# Altium PCB PCB.PcbDoc (part 1 of 2)
Units mm, origin at the board's own origin, x right, y up, seen from the top; angles counter-clockwise.
Board outline 40 x 40 mm, 4 copper layers (Top Layer, Layer 1, Layer 2, Bottom Layer), stack 1.587 mm thick; 76 components, 59 nets, 257 pads, 289 vias.
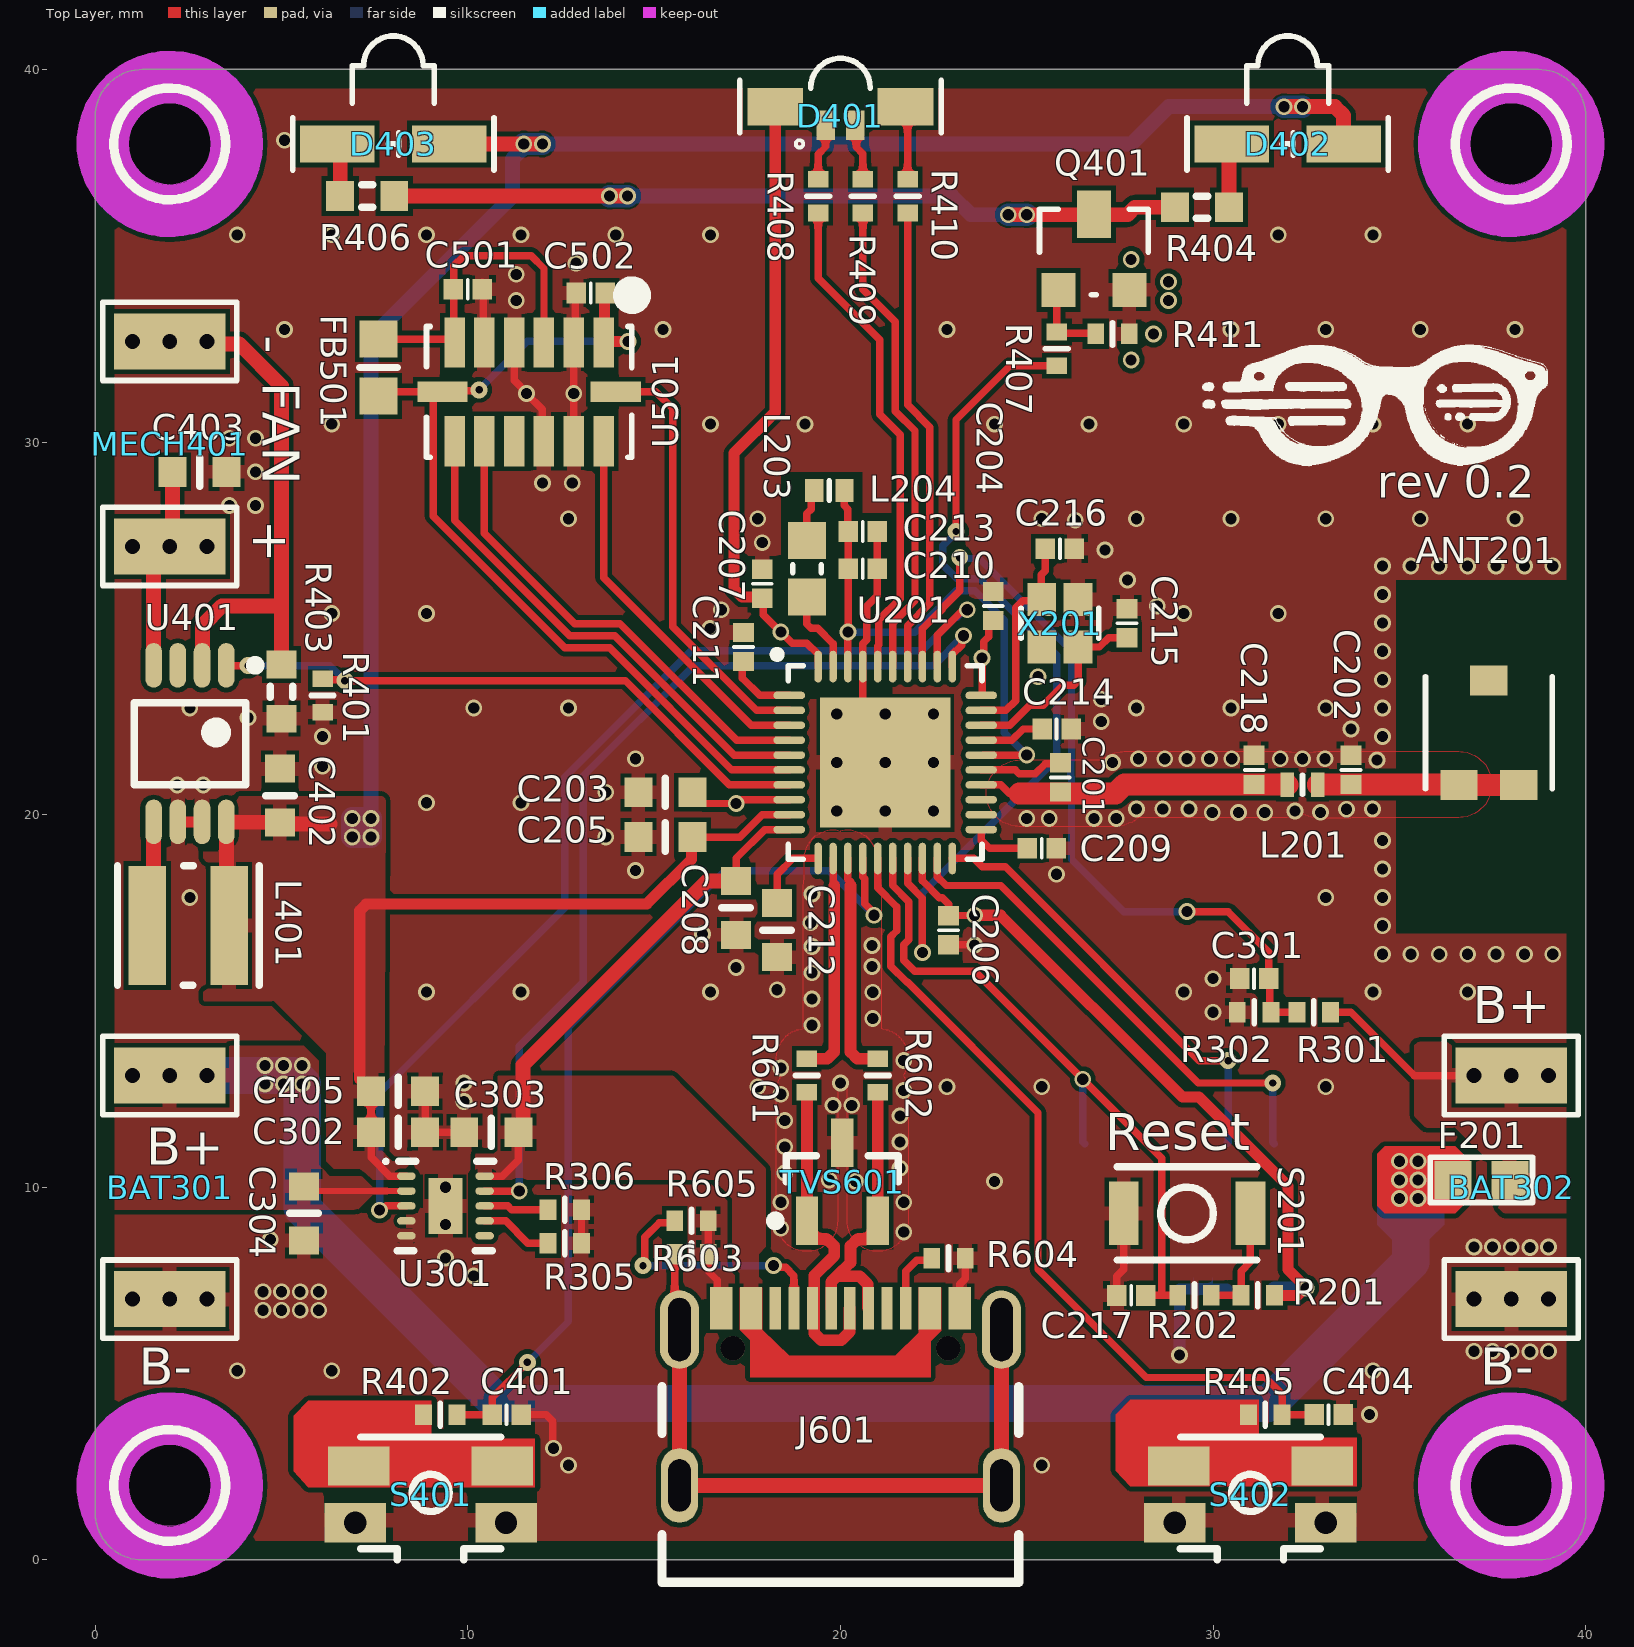
[diagram p0: Top Layer view]
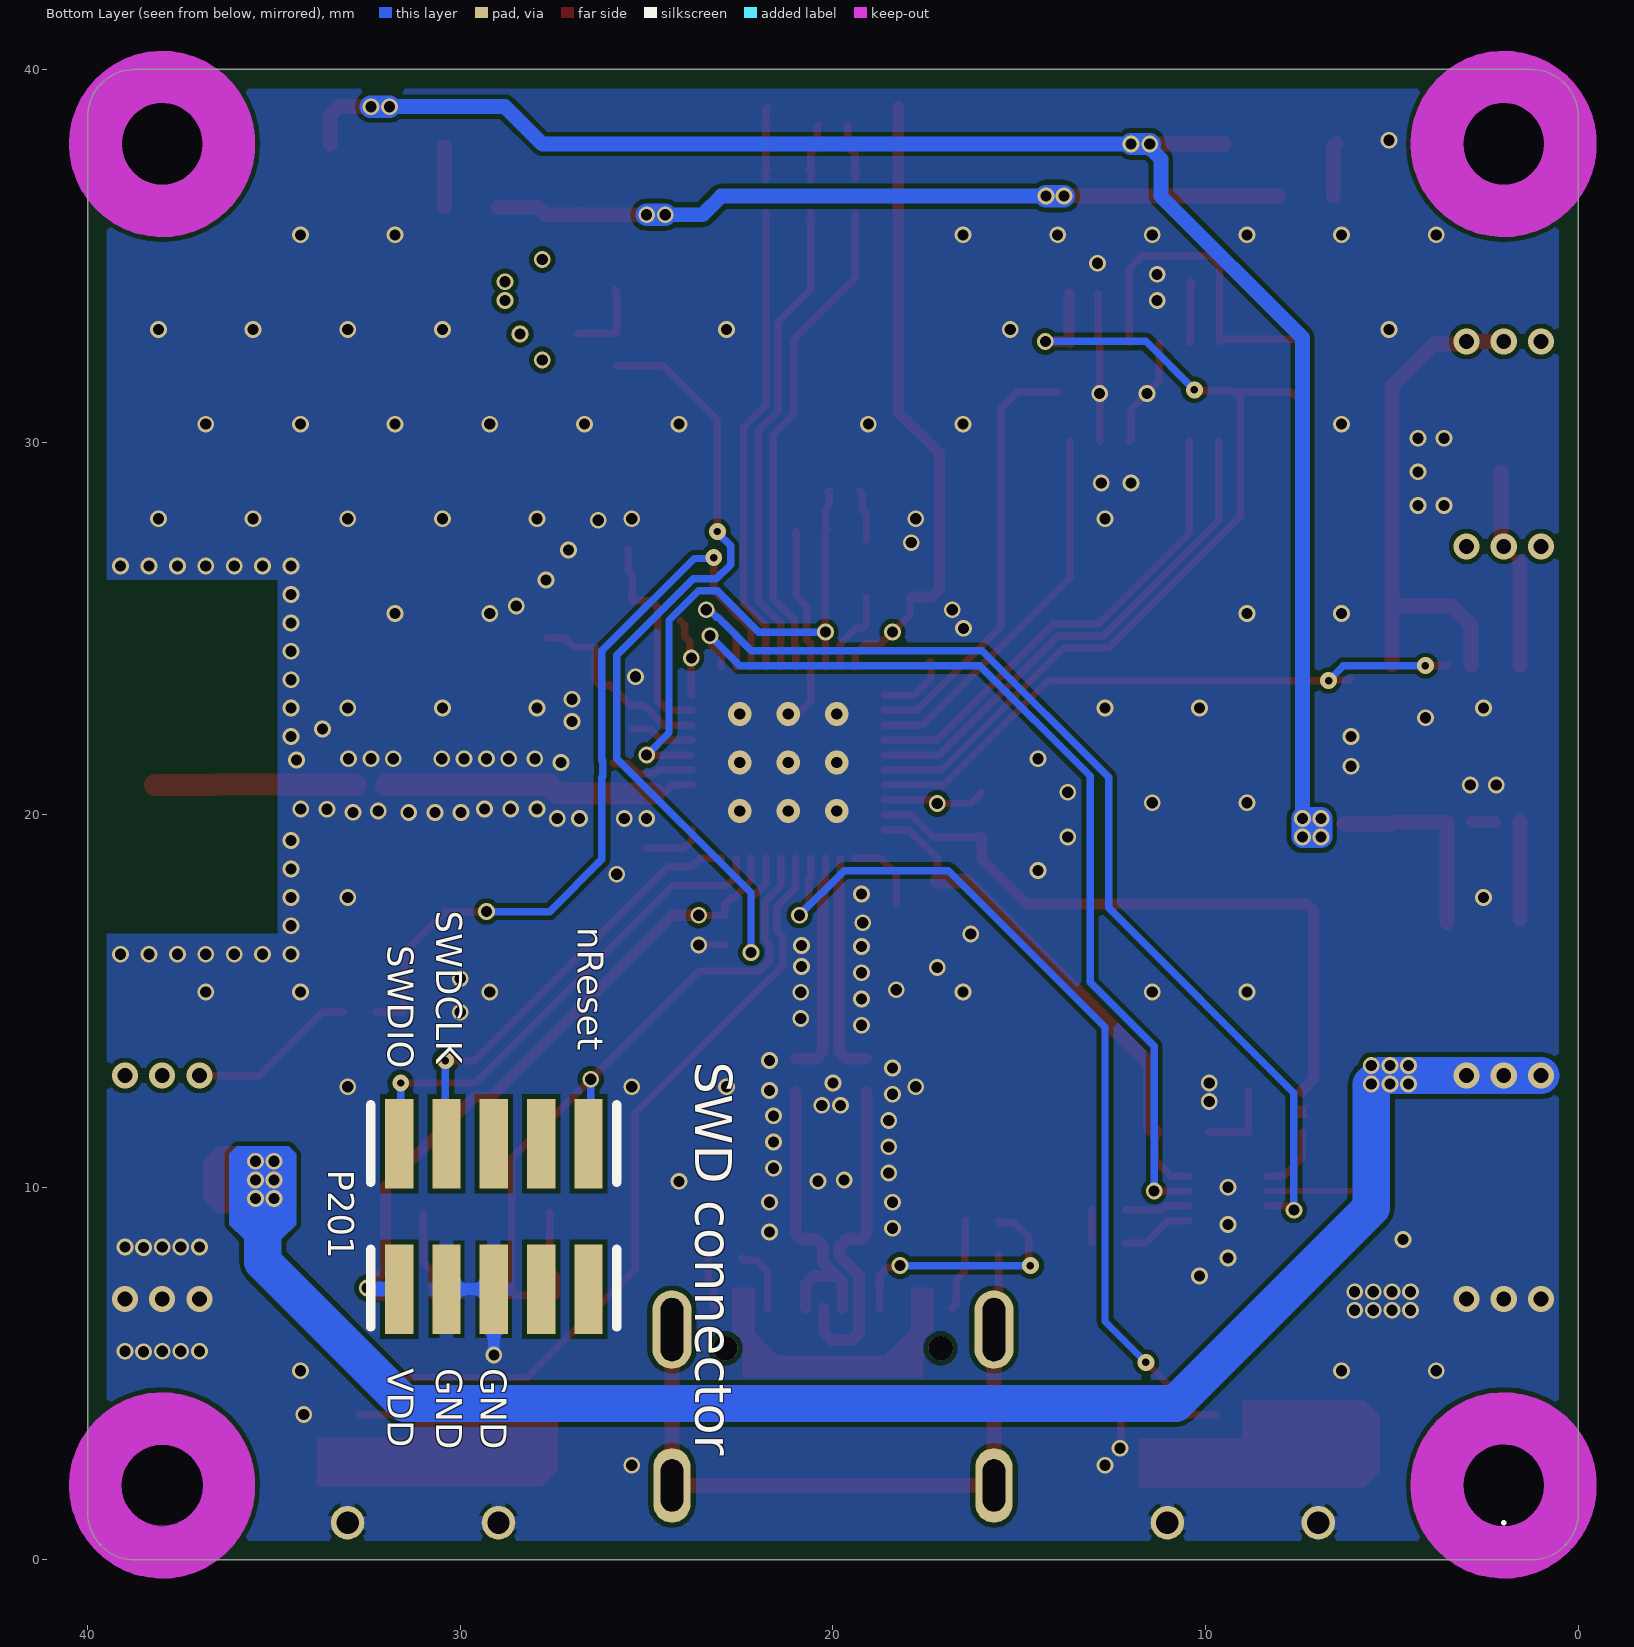
[diagram p1: Bottom Layer view, seen from below]
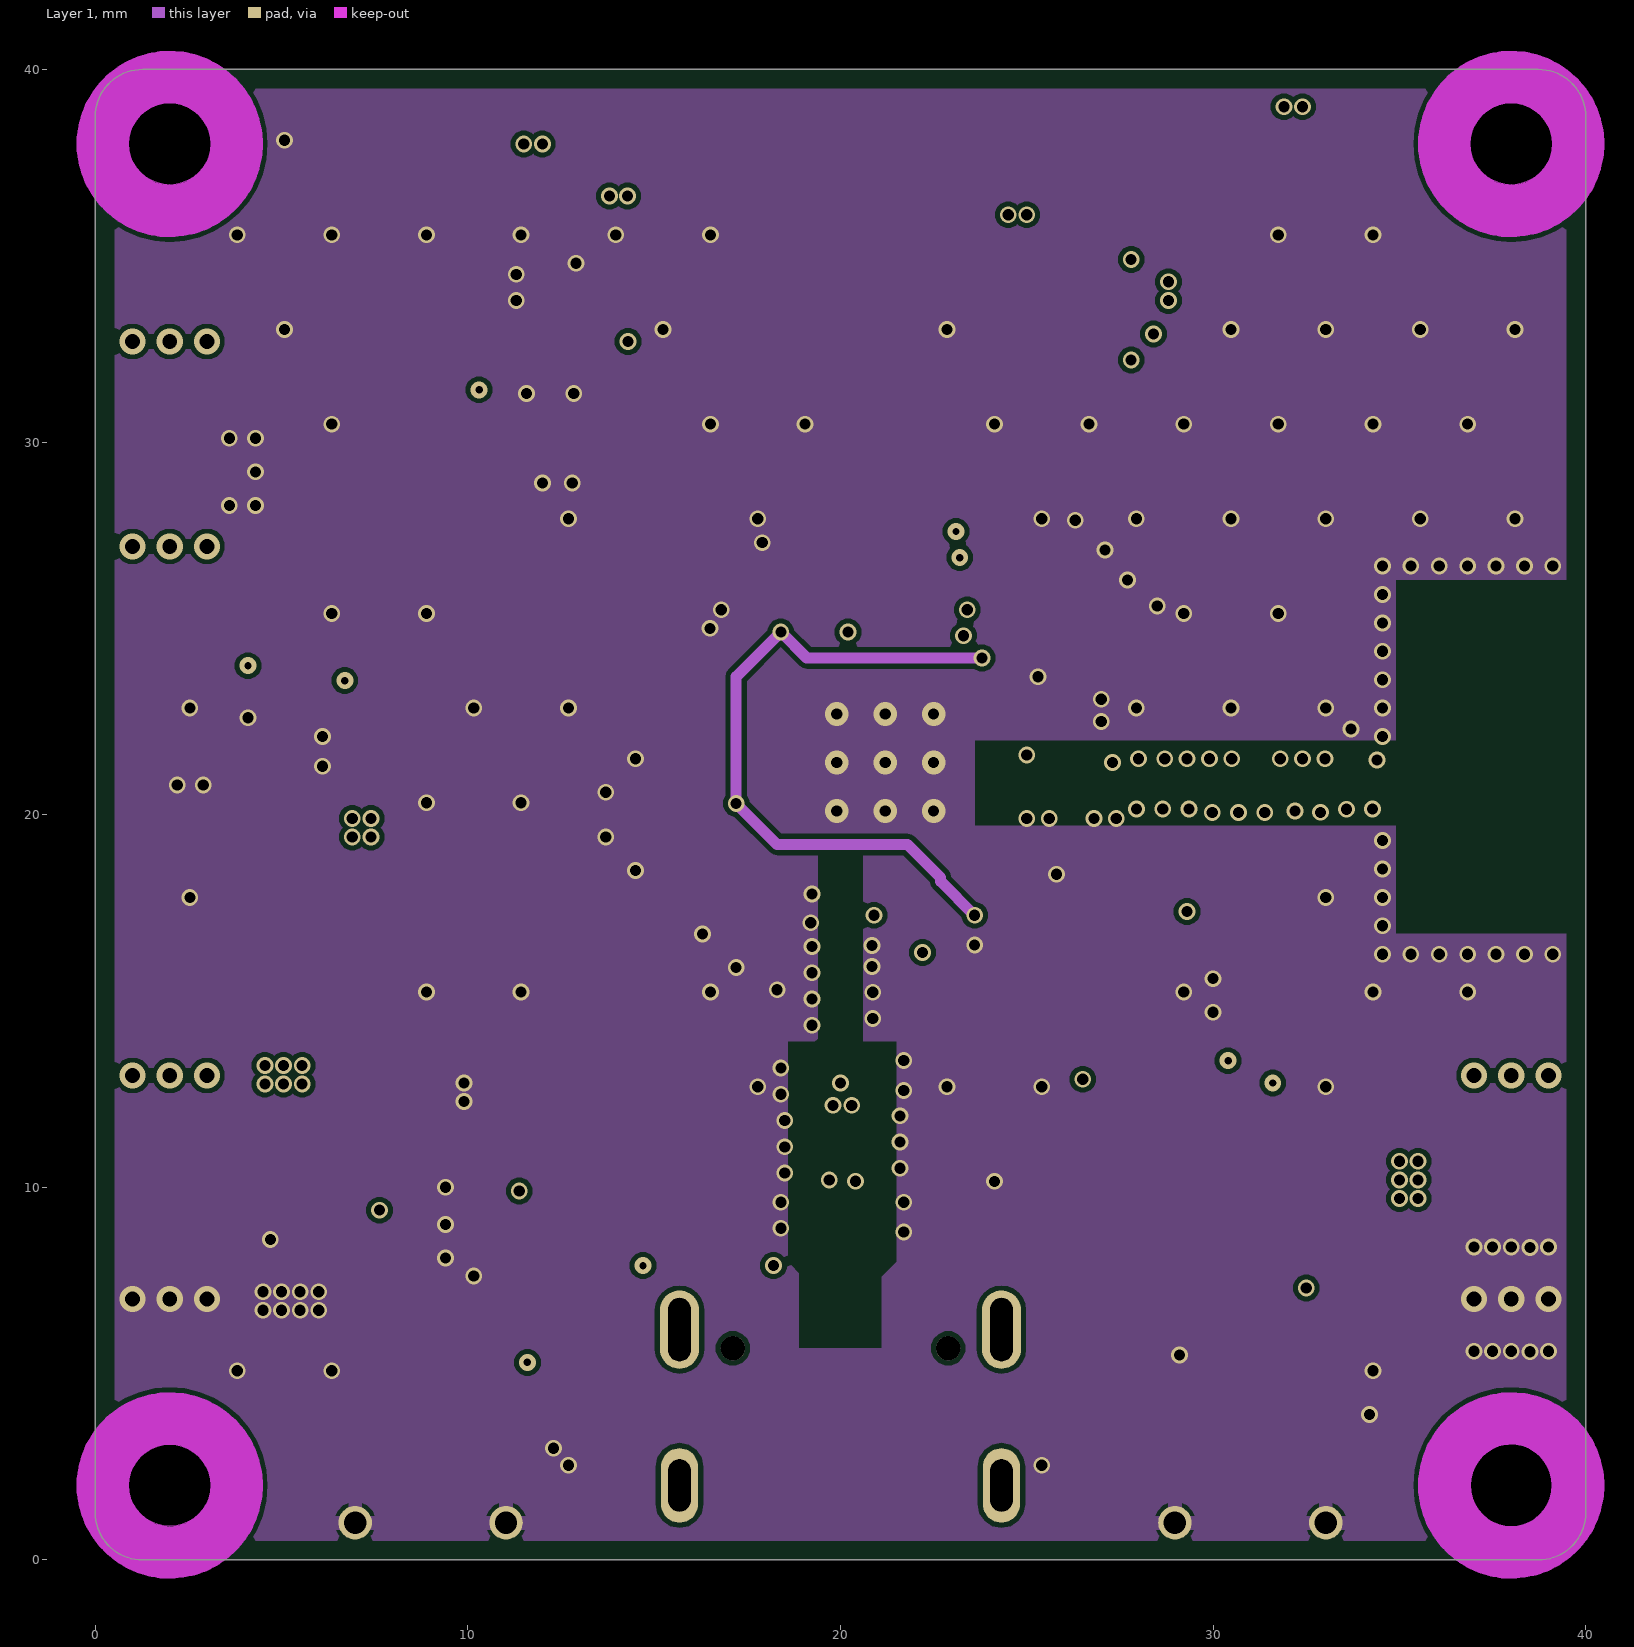
[diagram p2: Layer 1]
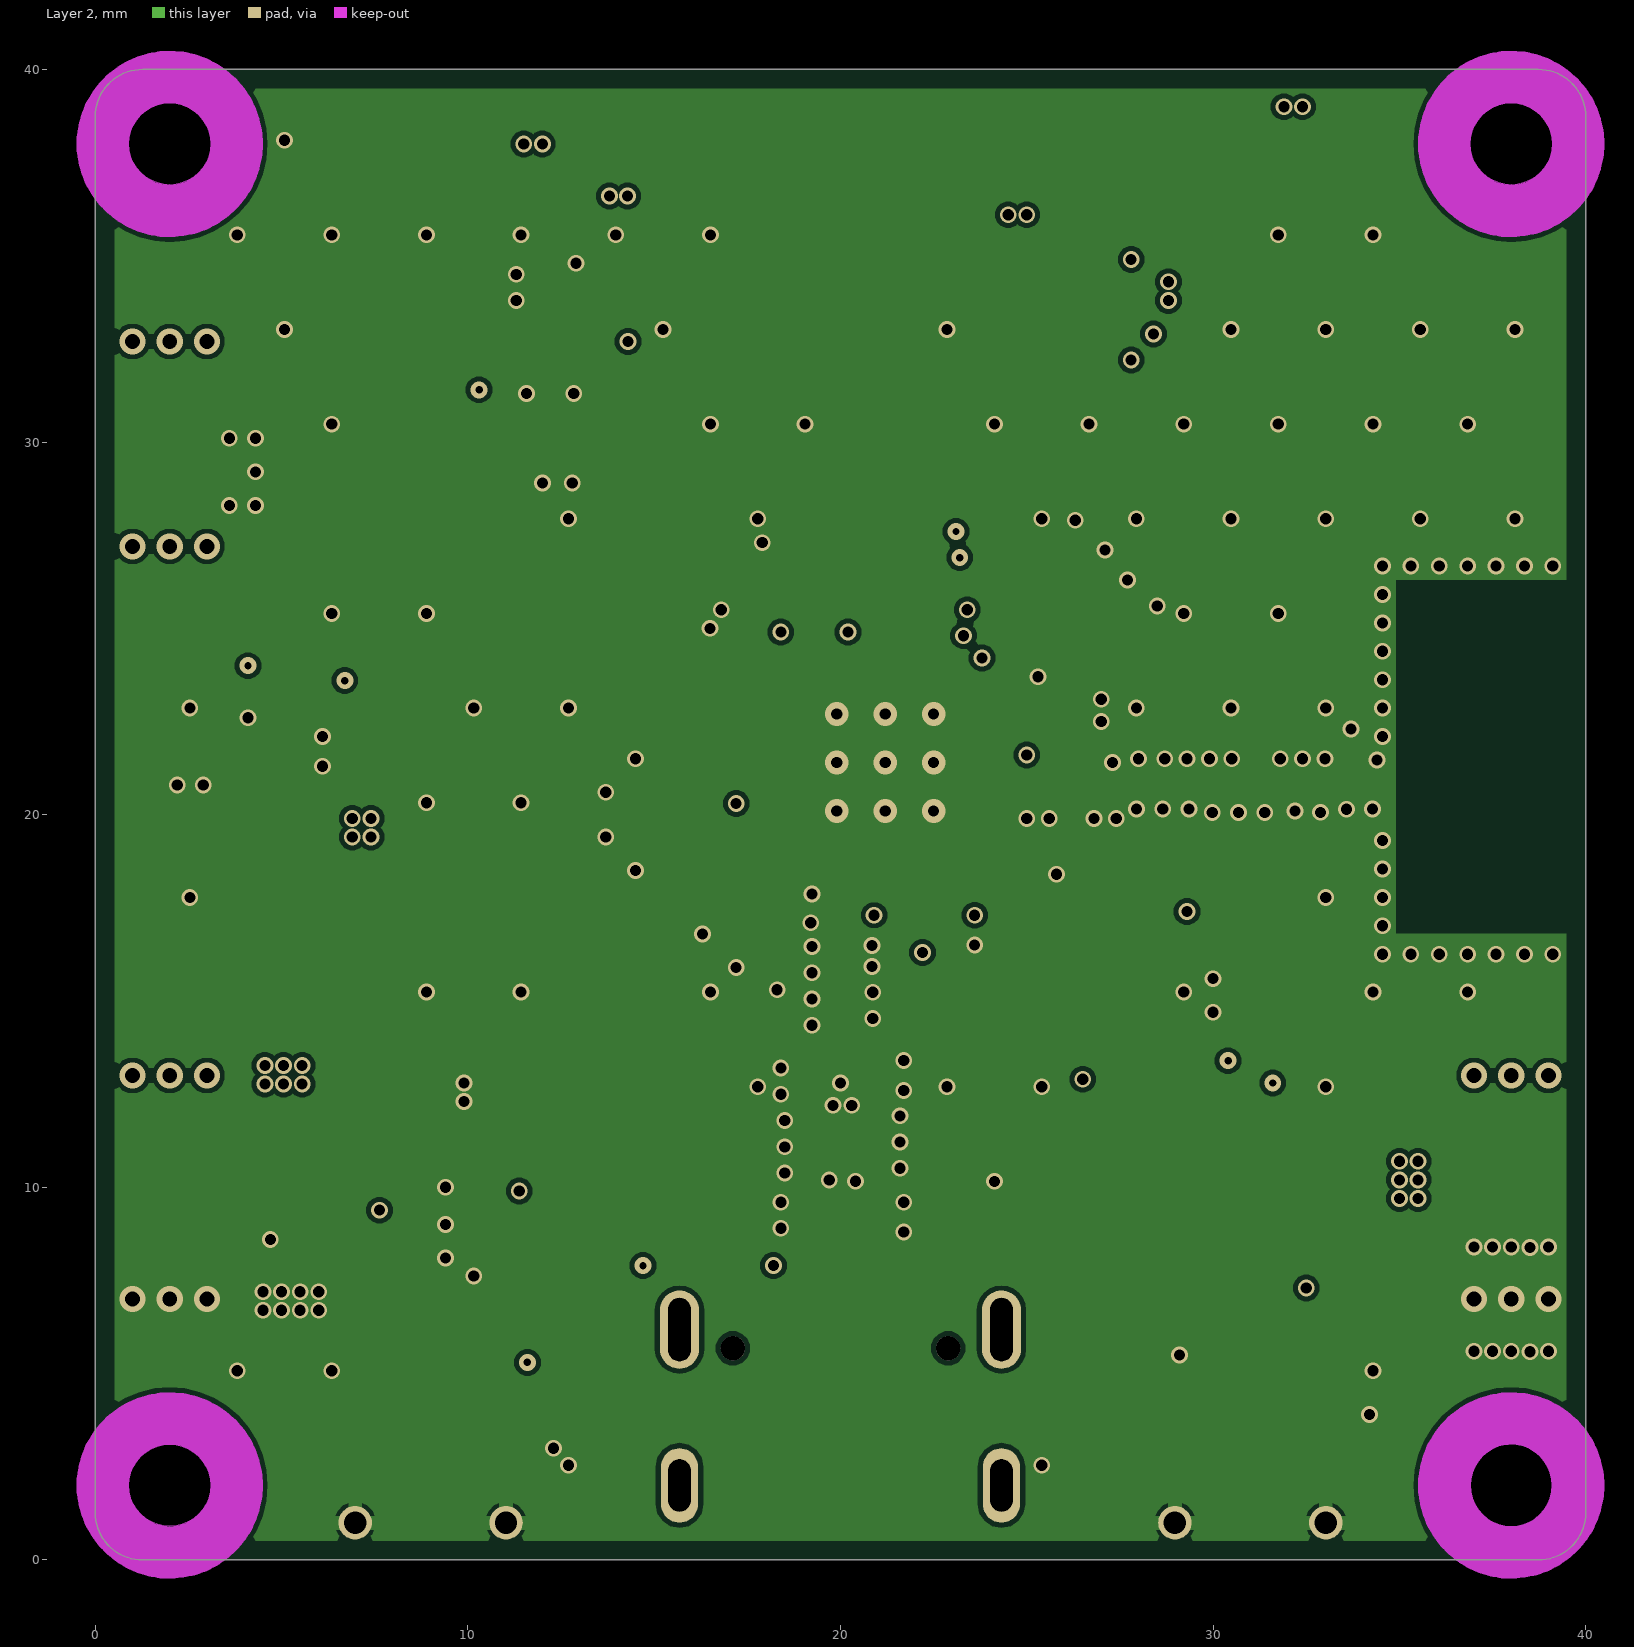
[diagram p3: Layer 2]
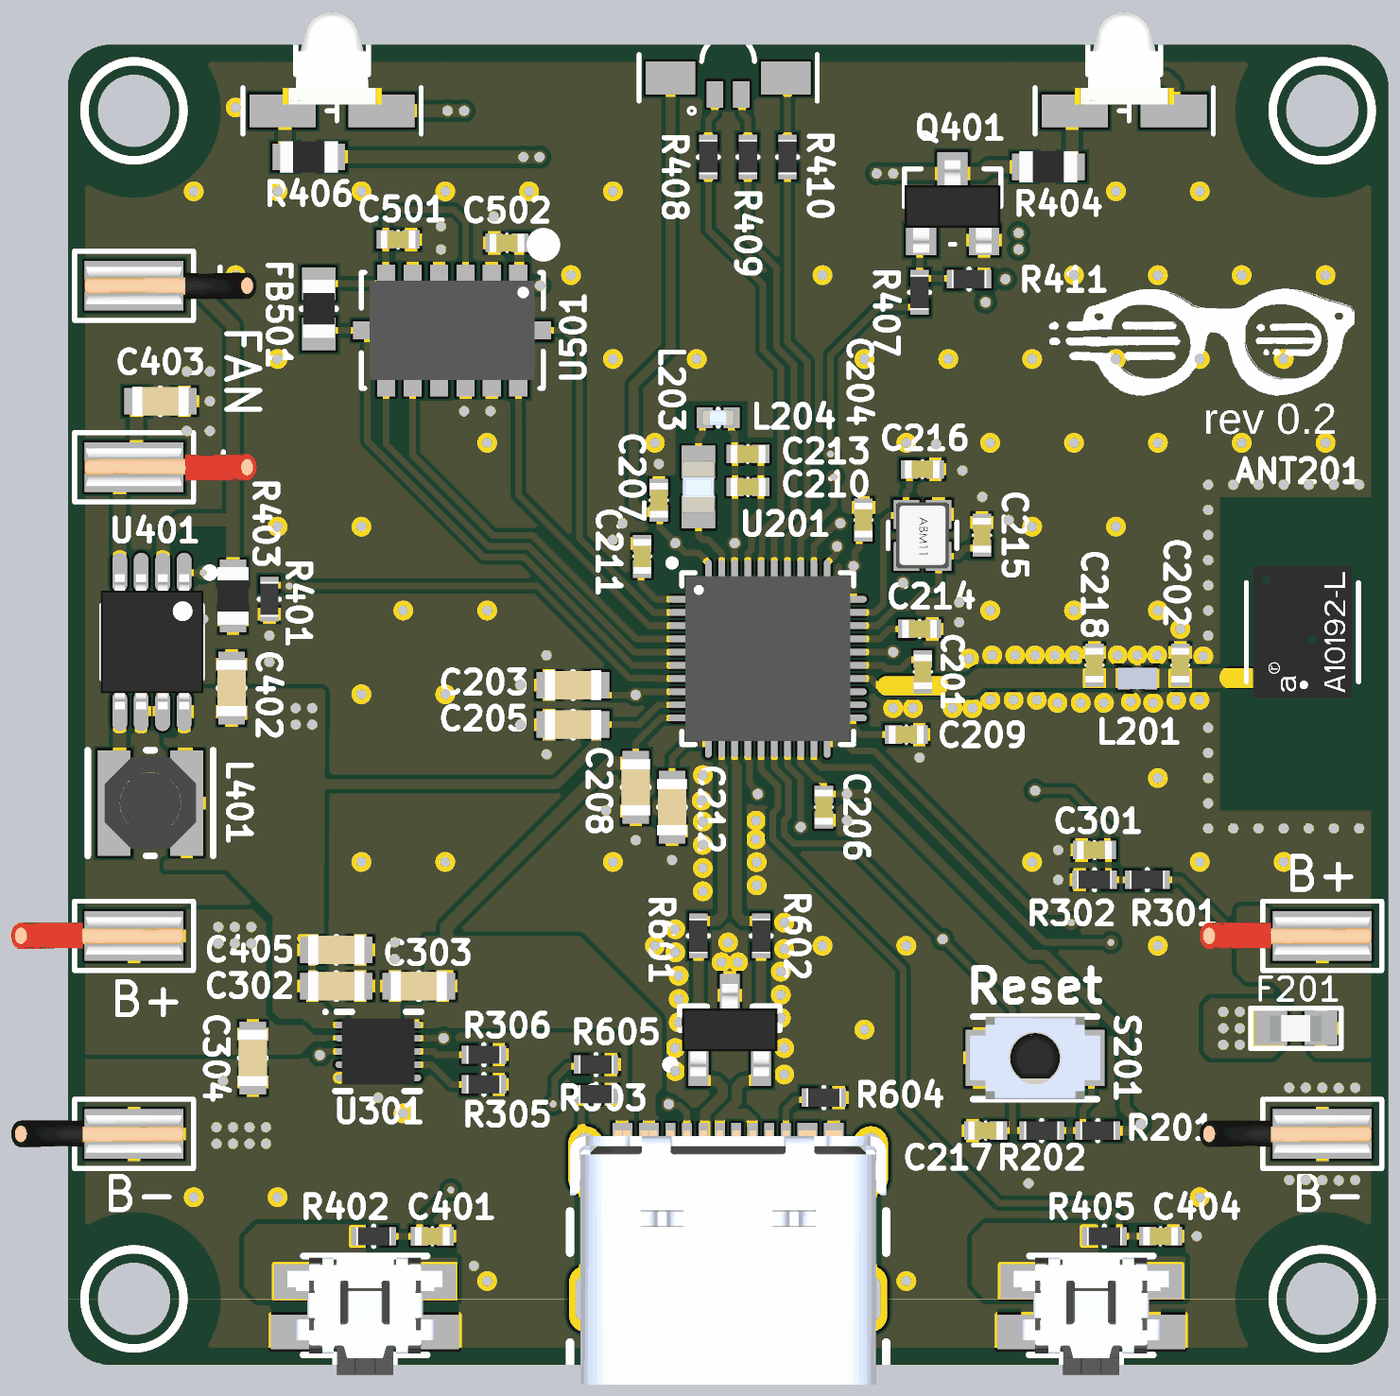
[diagram p4: 3D render of the assembled board from above, using the file's embedded part models]

## Layer stack, top to bottom
Top Solder: solder mask 0.0102, Solder Resist, Dk 3.5
Top Layer: signal copper 0.0356
Dielectric 2: prepreg 0.2104, PP-006, Dk 4.4
Layer 1: signal copper 0.0152
Dielectric 1: dielectric 1.065, FR-4, Dk 4.6
Layer 2: signal copper 0.0152
Dielectric 3: prepreg 0.2104, PP-006, Dk 4.4
Bottom Layer: signal copper 0.0356
Bottom Solder: solder mask 0.0102, Solder Resist, Dk 3.5

## Board outline
1.27,0 cw(c1.27,1.27) 0,1.27 0,38.73 cw(c1.27,38.73) 1.27,40 38.73,40 cw(c38.73,38.73) 40,38.73 40,1.27 cw(c38.73,1.27) 38.73,0
cut-out: 38,36.9 cw(c38,38) 36.9,38 cw(c38,38) 38,39.1 cw(c38,38) 39.1,38 cw(c38,38)
cut-out: 36.9,2 ccw(c38,2) 38,0.9 ccw(c38,2) 39.1,2 ccw(c38,2) 38,3.1 ccw(c38,2)
cut-out: 2,36.9 cw(c2,38) 0.9,38 cw(c2,38) 2,39.1 cw(c2,38) 3.1,38 cw(c2,38)
cut-out: 2,0.9 cw(c2,2) 0.9,2 cw(c2,2) 2,3.1 cw(c2,2) 3.1,2 cw(c2,2)

## Design rules (kind name [scope] priority, off if disabled: settings)
BoardOutlineClearance [All] p1: gap=0.2 ignorepadtopadclearanceinfootprint=FALSE except(0.508: Poly-OutlineEdge Poly-CavityEdge Poly-CutoutEdge Poly-SplitBarrior Poly-SplitContinuation)
Clearance Clearance_S90 [InNetClass('S90')] p1: gap=0.127 ignorepadtopadclearanceinfootprint=TRUE
Clearance Clearance_S50 [InNetClass('S50')] p2: gap=0.127 ignorepadtopadclearanceinfootprint=FALSE
Clearance [All] p3: gap=0.127 ignorepadtopadclearanceinfootprint=TRUE except(0.2: Track-SMDPad; 0.254: Track-Hole Via-Via; 0.33: Track-THPad; 0.54: THPad-THPad)
ComponentClearance [All] p1: gap=0.102 collisioncheckmode=3 verticalgap=0.102 showdistances=TRUE
DiffPairsRouting DiffPairsRouting_S90 [All] p1: maxlimit=0.127 minlimit=0.127 mostfreqgap=0.127 toplayer_minwidth=0.2 toplayer_maxwidth=0.313 toplayer_prefwidth=0.313 midlayer1_minwidth=0.13 midlayer1_maxwidth=0.13 midlayer1_prefwidth=0.13 midlayer2_minwidth=0.13 midlayer2_maxwidth=0.13 midlayer2_prefwidth=0.13 bottomlayer_minwidth=0.313 bottomlayer_maxwidth=0.313 bottomlayer_prefwidth=0.313 impedanceprofiledriven=TRUE impedanceprofileid={F4ACF164-5CF5-491D-852A-DF5C5D623BA9} impedanceprofilevalue=90.000000 maxuncoupledlength=12.7
DiffPairsRouting [All] p2: maxlimit=0.102 minlimit=0.102 mostfreqgap=0.102 toplayer_minwidth=0.102 toplayer_maxwidth=1816.048 toplayer_prefwidth=0.102 midlayer1_minwidth=0.102 midlayer1_maxwidth=1816.048 midlayer1_prefwidth=0.102 midlayer2_minwidth=0.102 midlayer2_maxwidth=1816.048 midlayer2_prefwidth=0.102 bottomlayer_minwidth=0.102 bottomlayer_maxwidth=1816.048 bottomlayer_prefwidth=0.102 maxuncoupledlength=12.7
Height [All] p1: minheight=0 maxheight=1816.048 prefheight=12.7
HoleSize [All] p1: absolutevalues=TRUE maxlimit=6.3 minlimit=0.3 maxpercent=80.000 minpercent=20.000
HoleToHoleClearance VIA_HOLE_TO_HOLE [IsVia vs isVia] p1: gap=0.2 allowstackedmicrovias=TRUE
HoleToHoleClearance [All] p2: gap=0.45 allowstackedmicrovias=FALSE
MinimumAnnularRing [All] p1: minimumring=0.05
MinimumSolderMaskSliver [All] p1: minsoldermaskwidth=0
PlaneClearance [All] p1: clearance=0.152
PlaneConnect [All] p1: pad.planeconnectstyle=Relief pad.reliefexpansion=0.3 pad.reliefentries=4 pad.reliefconductorwidth=0.381 pad.reliefairgap=0.102 via.planeconnectstyle=Direct via.reliefexpansion=0.3 via.reliefentries=4 via.reliefconductorwidth=0.127 via.reliefairgap=0.127
PolygonConnect [All] p1: thpad.connectstyle=Relief thpad.reliefconductorwidth=0.381 thpad.reliefentries=4 thpad.polygonreliefangle="90 Angle" thpad.airgapwidth=0.102 smdpad.connectstyle=Relief smdpad.reliefconductorwidth=0.381 smdpad.reliefentries=4 smdpad.polygonreliefangle="90 Angle" smdpad.airgapwidth=0.102 via.connectstyle=Direct via.reliefconductorwidth=0.127 via.reliefentries=4 via.polygonreliefangle="90 Angle" via.airgapwidth=0.127
RoutingVias [All] p1: holewidth=0.2 width=0.45 viastyle="Through Hole" minholewidth=0.2 minwidth=0.45 maxholewidth=6.3 maxwidth=6.55
SilkToSilkClearance [All] p1: silktosilkclearance=0
SilkToSolderMaskClearance [IsPad] p1: minsilkscreentomaskgap=0.05 clearancetoexposedcopper=TRUE
SolderMaskExpansion SolderMaskExpansion_VIA [IsVia] p1: expansion=-0.508 istentingtop=FALSE
SolderMaskExpansion [All] p2: expansion=0.075 istentingtop=FALSE
SupplyNets "Schematic Supply Nets_7" [InNet('USB.D_+')] p1: voltage=5.000
SupplyNets "Schematic Supply Nets_5" [InNet('USB.D_-')] p2: voltage=5.000
SupplyNets "Schematic Supply Nets_6" [InNet('VSYS')] p3: voltage=0.000
SupplyNets "Schematic Supply Nets_3" [InNet('5V_USB')] p4: voltage=0.000
SupplyNets "Schematic Supply Nets_2" [InNet('VDD_nRF')] p5: voltage=0.000
SupplyNets "Schematic Supply Nets_1" [InNet('VBAT')] p6: voltage=0.000
SupplyNets "Schematic Supply Nets" [InNet('GND')] p7: voltage=0.000
UnRoutedNet [All] p1: checkbadconnections=TRUE
Width Width_S50 [InNetClass('S50')] p1: maxlimit=0.59 minlimit=0.181 preferedwidth=0.59 toplayer_minwidth=0.2 midlayer1_maxwidth=0.181 midlayer1_prefwidth=0.181 midlayer2_maxwidth=0.181 midlayer2_prefwidth=0.181 bottomlayer_minwidth=0.59 impedanceprofiledriven=TRUE impedanceprofileid={B50FC1FD-5313-4FD3-8DF1-224697A8932B} impedanceprofilevalue=50.000000 minimp=50.000000 maximp=50.000000 favimp=50.000000
Width [All] p2: maxlimit=5.08 minlimit=0.127 preferedwidth=0.152
19 further rules are at their usual default settings.

## Classes and differential pairs
net class S90: USB.D_+ USB.D_- USB_D_+ USB_D_-
net class S50: NetANT201_1 NetC201_1
component class U_USB: J601 R601 R602 R603 R604 R605 TVS601
component class U_SENSORS: C501 C502 FB501 U501
component class U_POWER: BAT301 BAT302 C301 C302 C303 C304 F201 R301 R302 R305 R306 U301
component class U_PERIPHERALS: C401 C402 C403 C404 C405 D401 D402 D403 L401 MECH401 Q401 R401 R402 R403 R404 R405 R406 R407 R408 R409 R410 R411 S401 S402 U401
component class U_nRF52832: ANT201 C201 C202 C203 C204 C205 C206 C207 C208 C209 C210 C211 C212 C213 C214 C215 C216 C217 C218 L201 L203 L204 P201 R201 R202 S201 U201 X201
differential pair USB_D: +USB_D_+ -USB_D_-
differential pair USB.D: +USB.D_+ -USB.D_-

## Components (designator, comment, footprint, x,y, rotation, side; value= is the part's Value field where it differs from the comment)
ANT201 "2.4GHZ SMD antenna" ANT_A10192H 37.4,22.2 r90 top value=A10192H
BAT301 "MECH_BT" BAT_SOLDERING_PADS 2,10 r270 top value="LiPo 1000mAh"
BAT302 "MECH_BT" BAT_SOLDERING_PADS 38,10 r270 top locked value="LiPo 1000mAh"
C201 "Ceramic C0G" C_0402_1005 25.9,21 r90 top value=1pF
C202 "Ceramic C0G" C_0402_1005 33.7,21.2 r90 top value=1.2pF
C203 "Ceramic X5R" C_0603_1608 15.3,20.6 r180 top value=4.7uF
C204 "Ceramic X7R" C_0402_1005 24.1,25.6 r90 top value=100nF
C205 "Ceramic X5R" C_0603_1608 15.3,19.4 r180 top value=4.7uF
C206 "Ceramic X7R" C_0402_1005 22.9,16.9 r270 top value=100nF
C207 "Ceramic Capacitor" C_0402_1005 17.9,26.2 r90 top value=1uF
C208 "Ceramic X5R" C_0603_1608 17.2,17.5 r270 top value=4.7uF
C209 "Ceramic C0G" C_0402_1005 25.4,19.1 r0 top value=820pF
C210 "Ceramic X7R" C_0402_1005 20.6,26.6 r0 top value=47nF
C211 "Ceramic X7R" C_0402_1005 17.4,24.5 r90 top value=100nF
C212 "Ceramic X5R" C_0603_1608 18.3,16.9 r270 top value=4.7uF
C213 "Ceramic Capacitor" C_0402_1005 20.6,27.6 r0 top value=1uF
C214 "Ceramic C0G" C_0402_1005 25.8,22.3 r0 top value=100pF
C215 "Ceramic C0G" C_0402_1005 27.687,25.137 r90 top value=12pF
C216 "Ceramic C0G" C_0402_1005 25.887,27.137 r0 top value=12pF
C217 "Ceramic Capacitor" C_0402_1005 27.8,7.1 r180 top value=10nF
C218 "Ceramic C0G" C_0402_1005 31.1,21.2 r90 top value=TBD
C301 "Ceramic X7R" C_0402_1005 31.1,15.6 r180 top value=100nF
C302 "Ceramic X7T Low ESR and ESL" C_0603_1608 8.129,11.477 r0 top value=10uF
C303 "Ceramic X7R" C_0603_1608 10.629,11.477 r180 top value=1uF
C304 "Ceramic X7R" C_0603_1608 5.6,9.3 r270 top value=1uF
C401 "Ceramic Capacitor" C_0402_1005 11.04,3.898 r0 top value=10nF
C402 "Ceramic X5R" C_0603_1608 4.956,20.51 r90 top value=10uF
C403 "Ceramic X5R" C_0603_1608 2.8,29.2 r0 top value=22uF
C404 "Ceramic Capacitor" C_0402_1005 33.1,3.9 r0 top value=10nF
C405 "Ceramic X5R" C_0603_1608 8.129,12.577 r0 top value=22uF
C501 "Ceramic X7R" C_0402_1005 10,34.1 r0 top value=1uF
C502 "Ceramic X7R" C_0402_1005 13.3,34 r180 top value=100nF
D401 "RGB smd" OL_RGB_LTST-S310F2KT 20,39 r90 top value=LTST-S310F2KT
D402 "Red LED right angle" OL_R_APDA3020SECK 32,38 r90 top value=APDA3020SECK/J3-PF
D403 "Red LED right angle" OL_R_APDA3020SECK 8,38 r90 top value=APDA3020SECK/J3-PF
F201 "Fuse" F_0603_1608 37.2,10.2 r0 top value=SF-0603F050-2
FB501 "Ferrite bead" FB_0603_1608 7.6,32 r90 top value=BLM18BB221SN1D
J601 "USB C Connector" J_USB_C_USB4105 20,2 r0 top value=USB4105-GF-A
L201 "Inductor" L_0402CS 32.4,20.8 r0 top value=4.7nH
L203 "Power Inductors" L_0603_1608 19.1,26.6 r90 top value=10uH
L204 "Inductor" L_0402_1005 19.7,28.7 r0 top value=15nH
L401 "Inductor" L_WE-TPC_2813 2.498,17.025 r180 top value=4.7uH
MECH401 "MECH_FAN_4010" FAN_4010_PAD 2,30 r90 top locked
P201 "Jtag" P_HEADER_2x5_1.27 29.1,9.3 r180 bottom value=20021121-00010C4LF
Q401 "2N7002K-7" SOT23_TO236_SC59 26.8,35.1 r0 top
R201 "Resistor" R_0402_1005 31.2,7.1 r180 top value=47k
R202 "Resistor" R_0402_1005 29.5,7.1 r0 top value=1k
R301 "Resistor" R_0402_1005 32.7,14.7 r0 top value=47k
R302 "Resistor" R_0402_1005 31.1,14.7 r0 top value=47k
R305 "Resistor" R_0402_1005 12.6,8.5 r180 top value=18k
R306 "Resistor" R_0402_1005 12.6,9.4 r180 top value=620R
R401 "Resistor" R_0402_1005 6.1,23.2 r270 top value=47k
R402 "Resistor" R_0402_1005 9.262,3.898 r180 top value=510R
R403 "Resistor" R_0603_1608 5,23.3 r90 top value=680m
R404 "Resistor" R_0603_1608 29.7,36.3 r0 top value=68R
R405 "Resistor" R_0402_1005 31.4,3.9 r180 top value=510R
R406 "Resistor" R_0603_1608 7.3,36.6 r180 top value=68R
R407 "Resistor" R_0402_1005 25.8,32.5 r90 top value=1k
R408 "Resistor" R_0402_1005 19.4,36.6 r90 top value=680R
R409 "Resistor" R_0402_1005 20.6,36.6 r90 top value=330R
R410 "Resistor" R_0402_1005 21.8,36.6 r90 top value=330R
R411 "Resistor" R_0402_1005 27.3,32.9 r180 top value=47k
R601 "Resistor" R_0402_1005 19.1,13 r90 top value=27R
R602 "Resistor" R_0402_1005 21,13 r90 top value=27R
R603 "Resistor" R_0402_1005 16,8.2 r180 top value=10k
R604 "Resistor" R_0402_1005 22.9,8.1 r180 top value=5.1k
R605 "Resistor" R_0402_1005 16,9.1 r180 top value=5.1k
S201 "Ultra-small Tactile Switch" B3U-1000P 29.3,9.3 r180 top value=B3U-1000PM
S401 "Light Touch Switch, 4.7X3.5Mm, Smd" EVQ-9P701P 9,1.8 r180 top value=EVQ-9P701P
S402 "Light Touch Switch, 4.7X3.5Mm, Smd" EVQ-9P701P 31,1.8 r180 top value=EVQ-9P701P
TVS601 "TVS dual low capacitance" SOT23_N 20.05,10.15 r90 top value=PESD2USB5UX-TR
U201 "NRF52833-QDAA" QFN40_5x5 21.2,21.4 r0 top value=NRF52833-QDAA_R7
U301 "1-cell, 1-A stand-alone linear battery charger with power path and solar input support" WSON10_2.2x2 9.4,9.5 r0 top value=BQ25185DLHR
U401 "MCP1643" MSOP8_TSSOP8_3X3 2.543,21.907 r270 top value=MCP1643T-I/MS
U501 "ADXL345BCCZ-RL7 Analog Devices Accelerometer X, Y, Z Axis 14LGA RoHS" LGA14_3x5 11.643,31.346 r270 top value=ADXL345BCCZ-RL7
X201 "32 MHz Oscilator" X_2x1.6_4PIN 25.887,25.137 r270 top value=32MHz

## Footprints (in the part's own frame and the unit in brackets; to place one, negate y for a bottom-side part, rotate by r counter-clockwise, add the part's x,y. Pads: shape width x height; smd on the part's side, far side on the other; paste and mask are expansions set on the pad)
ANT_A10192H [mm] "GNSS Single-band Chip Antennas"
  rect 0.8x1 smd: 1(-1.4,-0.8) 2(-1.4,0.8) 3(1.4,0)
  silkscreen extent -1.5,-1.7 1.5,1.7, body extent -2.01,-1.5 1.99,1.5, height 1.11
B3U-1000P [mm]
  rect 0.8x1.7 smd: 1(-1.7,0) 2(1.7,0)
  silkscreen extent -1.88,-1.25 1.88,1.25, body extent -2,-1.25 2,1.25, height 1.6
BAT_SOLDERING_PADS [mm]
  rect 1.5x3 smd: 1(-3,0) 2(3,0)
  silkscreen extent -4.05,-1.8 4.05,1.8, body extent -3.57,-3.72 3.57,1.5, height 1.44
C_0402_1005 [mm]
  rect 0.52x0.56 smd: 1(-0.39,0) 2(0.39,0)
  silkscreen extent 0,-0.25 0,0.25, body extent -0.52,-0.27 0.53,0.28, height 0.55
C_0603_1608 [mm]
  rect 0.75x0.8 smd: 1(-0.725,0) 2(0.725,0)
  silkscreen extent 0,-0.38 0,0.38, body extent -0.85,-0.45 0.85,0.45, height 0.89
EVQ-9P701P [mm]
  rect 1.65x1.05 smd: 1(-1.925,-0.725) 1(1.925,-0.725) 2(-2.025,0.8) 2(2.025,0.8)
  round 0.9 hole 0.6: 2(-2.025,0.8) 2(2.025,0.8)
  silkscreen extent -1.88,-1.5 1.88,1.8, body extent -2.35,-1.45 2.35,2.1, height 1.39
F_0603_1608 [mil]
  rect 39x40 smd: 1(-30,0) 2(30,0)
  silkscreen extent -54,-24 54,24, body extent -31,-16 32,16, height 32
FAN_4010_PAD [mm]
  rect 1.5x3 smd: 1(-2.8,0) 2(2.7,0)
  silkscreen extent -3.85,-1.8 3.75,1.8, body extent -3.37,-3.72 3.27,1.5, height 1.44
FB_0603_1608 [mil]
  rect 39x40 smd: 1(-30,0) 2(30,0)
  silkscreen extent 0,-20 0,20, body extent -34,-19 34,19, height 21
J_USB_C_USB4105 [mm]
  rect 0.3x1.15 smd: A5(-1.25,4.755) A6(-0.25,4.755) A7(0.25,4.755) A8(1.25,4.755) B5(1.75,4.755) B6(0.75,4.755) B7(-0.75,4.755) B8(-1.75,4.755)
  rect 0.6x1.15 smd: AB49(-2.4,4.755) AB112(-3.2,4.755) BA49(2.4,4.755) BA112(3.2,4.755)
  round 0.65 hole 0.65 unplated: DNC(-2.89,3.68) DNC(2.89,3.68)
  oval 1x2 hole 0.6 slot 1.4 at 90 deg: MH(-4.32,0) MH(4.32,0)
  oval 1.05x2.1 hole 0.6 slot 1.7 at 90 deg: MH(-4.32,4.18) MH(4.32,4.18)
  silkscreen extent -4.79,-2.6 4.79,2.65, body extent -4.79,-2.6 4.79,5.11, height 3.31
L_0402_1005 [mm]
  rect 0.49x0.62 smd: 1(-0.405,0) 2(0.405,0)
  silkscreen extent 0,-0.25 0,0.25, body extent -0.5,-0.25 0.5,0.25, height 0.5
L_0402CS [mm]
  rect 0.36x0.66 smd: 1(-0.41,0) 2(0.41,0)
  silkscreen extent 0,-0.25 0,0.25, body extent -0.59,-0.32 0.59,0.32, height 0.66
L_0603_1608 [mil]
  rect 39x40 smd: 1(-30,0) 2(30,0)
  silkscreen extent -4,-15 4,15, body extent -31,-20 32,20, height 31
L_WE-TPC_2813 [mm]
  rect 1x3.2 smd: 1(-1.1,0) 2(1.1,0)
  silkscreen extent -1.9,-1.6 1.9,1.6, body extent -1.39,-1.39 1.39,1.39, height 1.21
LGA14_3x5 [mm]
  rect 1.35x0.55 smd: 1(-1.325,2) 2(-1.325,1.2) 3(-1.325,0.4) 4(-1.325,-0.4) 5(-1.325,-1.2) 6(-1.325,-2) 8(1.325,-2) 9(1.325,-1.2) 10(1.325,-0.4) 11(1.325,0.4) 12(1.325,1.2) 13(1.325,2)
  rect 0.55x1.35 smd: 7(0,-2.325) 14(0,2.325)
  silkscreen extent -2.85,-2.75 1.75,3.02, body extent -1.5,-2.5 1.5,2.5, height 1.01
MSOP8_TSSOP8_3X3 [mm] "TSOP, 8-Leads, Body 3.00x3.00mm, Pitch 0.65mm, IPC High Density"
  oval 1.2x0.45 smd: 1(-2.1,0.975) 2(-2.1,0.325) 3(-2.1,-0.325) 4(-2.1,-0.975) 5(2.1,-0.975) 6(2.1,-0.325) 7(2.1,0.325) 8(2.1,0.975)
  silkscreen extent -2.22,-1.5 1.1,1.88, body extent -2.05,-1.55 2.05,1.55, height 1.09
OL_R_APDA3020SECK [mm]
  rect 1x2 smd: 1(0,1.5) 2(0,-1.5)
  silkscreen extent -0.7,-2.7 2.9,2.7, body extent 0.2,-1.5 3,1.5, height 2.01
OL_RGB_LTST-S310F2KT [mm]
  rect 0.8x0.5 smd: 1(-0.5,0.4) 2(-0.5,-0.4)
  rect 1x1.5 smd: 3(0,-1.75) 4(0,1.75)
  silkscreen extent -1.1,-2.7 1.3,2.7, body extent -0.3,-1.8 1.2,1.8, height 1
P_HEADER_2x5_1.27 [mm]
  rect 0.76x2.4 smd: 1(-2.54,-2.032) 2(-2.54,1.868) 3(-1.27,-2.032) 4(-1.27,1.868) 5(0,-2.032) 6(0,1.868) 7(1.27,-2.032) 8(1.27,1.868) 9(2.54,-2.032) 10(2.54,1.868)
  silkscreen extent -3.3,-3.05 3.3,2.92, body extent -3.17,-2.83 3.18,2.67, height 4.51
QFN40_5x5 [mm]
  oval 0.85x0.2 smd: 1(-2.575,1.8) 2(-2.575,1.4) 3(-2.575,1) 4(-2.575,0.6) 5(-2.575,0.2) 6(-2.575,-0.2) 7(-2.575,-0.6) 8(-2.575,-1) 9(-2.575,-1.4) 10(-2.575,-1.8) 21(2.575,-1.8) 22(2.575,-1.4) 23(2.575,-1) 24(2.575,-0.6) 25(2.575,-0.2) 26(2.575,0.2) 27(2.575,0.6) 28(2.575,1) 29(2.575,1.4) 30(2.575,1.8)
  oval 0.2x0.85 smd: 11(-1.8,-2.575) 12(-1.4,-2.575) 13(-1,-2.575) 14(-0.6,-2.575) 15(-0.2,-2.575) 16(0.2,-2.575) 17(0.6,-2.575) 18(1,-2.575) 19(1.4,-2.575) 20(1.8,-2.575) 31(1.8,2.575) 32(1.4,2.575) 33(1,2.575) 34(0.6,2.575) 35(0.2,2.575) 36(-0.2,2.575) 37(-0.6,2.575) 38(-1,2.575) 39(-1.4,2.575) 40(-1.8,2.575)
  rect 3.5x3.5 smd paste-3: EP1(0,0)
  silkscreen extent -3,-2.6 2.6,3, body extent -2.5,-2.5 2.5,2.5, height 0.91
R_0402_1005 [mm] "Chip Resistor, 2-Leads, Body 1.00x0.50mm, IPC High Density"
  rect 0.45x0.55 smd: 1(-0.45,0) 2(0.45,0)
  silkscreen extent 0,-0.3 0,0.3, body extent -0.53,-0.28 0.53,0.28, height 0.37
R_0603_1608 [mm]
  rect 0.75x0.8 smd: 1(-0.725,0) 2(0.725,0)
  silkscreen extent -0.15,-0.3 0.15,0.3, body extent -0.87,-0.47 0.88,0.48, height 0.54
SOT23_N [mm] "SOT23, 3-Leads, Body 2.9x1.3mm, Pitch 0.95mm, Lead Span 2.3mm, IPC Medium Density"
  rect 1.3x0.6 smd: 1(-1.05,0.95) 2(-1.05,-0.95) 3(1.05,0)
  silkscreen extent -1.17,-1.5 0.7,1.92, body extent -1.4,-1.45 1.4,1.45, height 1.29
SOT23_TO236_SC59 [mil]
  rect 36x36 smd: 1(-37.5,-40) 2(37.5,-40)
  rect 36x50 smd: 3(0,40)
  silkscreen extent -57,-45 58,45, body extent -57,-55 57,55, height 51
WSON10_2.2x2 [mm]
  oval 0.5x0.2 smd: 1(-1.05,0.8) 2(-1.05,0.4) 3(-1.05,0) 4(-1.05,-0.4) 5(-1.05,-0.8) 6(1.05,-0.8) 7(1.05,-0.4) 8(1.05,0) 9(1.05,0.4) 10(1.05,0.8)
  rect 0.9x1.5 smd: EP1(0,0)
  silkscreen extent -1.65,-1.2 1.3,1.24, body extent -1.1,-1 1.1,1, height 0.8
X_2x1.6_4PIN [mm] "Crystal resonator; 2.0mm x 1.6mm"
  rect 0.875x0.775 smd: 1(-0.637,-0.487) 2(0.637,-0.487) 3(0.637,0.487) 4(-0.637,0.487)
  silkscreen extent -0.4,-1.04 0.4,1.04, body extent -1,-0.8 1,0.8, height 0.59

## Part data
ANT201: library part ANT_A10192H, Manufacturer=Antenova, Manufacturer Part Number=A10192H, HelpURL=https://www.antenova.com/wp-content/uploads/2021/03/Fusca-A10192H-PS-1.2.pdf, Part Number=ANT_A10192H, SCH_Footprint=A10192H, Supplier 1=TME, Supplier 2="RS Components", Supplier 3=Farnell, Supplier 4=Mouser, Supplier 5=Digi-Key, Supplier 6=LCSC, Supplier Part Number 4=237-A10192H, Supplier Part Number 5=627-1128-1-ND
BAT301 BAT302: "Battery"
C201 C218: library part C_1pF_50V_C0G_0402_10, "Capacitor", Dielectric=C0G, Manufacturer=Murata, Manufacturer Part Number=GRM1555C1H1R0BA01D, Tolerance (%)=10, Voltage=50V, HelpURL=http://www.tme.eu/en/Document/5947ce51172a7aff0401fb95866ce9a2/GRM1555C1H1R0BA01-01.pdf, Part Number=C_1pF_50V_C0G_0402_10, SCH_Footprint=0402, Supplier 1=TME, Supplier 2="RS Components", Supplier 3=Farnell, Supplier 4=Mouser, Supplier 5=Digi-Key, Supplier 6=LCSC, Supplier Part Number 1=GRM1555C1H1R0BA01D, Supplier Part Number 2=7235335, Supplier Part Number 3=2611893, Supplier Part Number 4=81-GRM1555C1H1R0BA1D, Supplier Part Number 5=490-6206-1-ND
C202: library part C_1.2pF_50V_C0G_0402_4, "Capacitor", Dielectric=C0G, Manufacturer=Murata, Manufacturer Part Number=GJM1555C1H1R2WB01D, Tolerance (%)=4, Voltage=50V, HelpURL=https://datasheet.octopart.com/GJM1555C1H1R2WB01D-Murata-datasheet-138724563.pdf, Part Number=C_1.2pF_50V_C0G_0402_4, SCH_Footprint=0402, Supplier 1=TME, Supplier 2="RS Components", Supplier 3=Farnell, Supplier 4=Mouser, Supplier 5=Digi-Key, Supplier 6=LCSC, Supplier Part Number 2=8467246, Supplier Part Number 3=2781428, Supplier Part Number 4=81-GJM1555C1H1R2WB1D, Supplier Part Number 5=490-11195-1-ND
C203 C205 C208 C212: library part C_4.7uF_16V_X5R_0603_10, "Capacitor", Dielectric=X5R, Manufacturer=Murata, Manufacturer Part Number=GRM188R61C475KAAJD, Tolerance (%)=10, Voltage=16V, HelpURL=https://datasheet.octopart.com/GRM188R61C475KAAJD-Murata-datasheet-66077093.pdf, Part Number=C_4.7uF_16V_X5R_0603_10, SCH_Footprint=0603, Supplier 1=TME, Supplier 2="RS Components", Supplier 3=Farnell, Supplier 4=Mouser, Supplier 5=Digi-Key, Supplier 6=LCSC, Supplier Part Number 2=884-7264P, Supplier Part Number 3=2611924, Supplier Part Number 4=81-GRM188R61C475KAJD, Supplier Part Number 5=490-10481-2-ND
C204 C206 C211 C502: library part C_100nF_10V_X7R_0402_10, "Capacitor", Dielectric=X7R, Manufacturer=Murata, Manufacturer Part Number=GRM155R71A104KA01D, Tolerance (%)=10, Voltage=10V, HelpURL=https://octopart.com/datasheet/grm155r71a104ka01d-murata-6810561, Part Number=C_100nF_10V_X7R_0402_10, SCH_Footprint=0402, Supplier 1=TME, Supplier 2="RS Components", Supplier 3=Farnell, Supplier 4=Mouser, Supplier 5=Digi-Key, Supplier 6=LCSC, Supplier Part Number 1=GRM155R71A104KA01D, Supplier Part Number 3=1828860, Supplier Part Number 4=81-GRM155R71A104KA1D, Supplier Part Number 5=490-6321-1-ND
C207 C213: library part C_1uF_10V_X7S_0402_10, "Capacitor", Dielectric=X7S, Manufacturer=Murata, Manufacturer Part Number=GRM155C71A105KE11D, Tolerance (%)=10, Voltage=10V, HelpURL=https://datasheet.octopart.com/GRM155C71A105KE11D-Murata-datasheet-138740431.pdf, Part Number=C_1uF_10V_X7S_0402_10, SCH_Footprint=0402, Supplier 1=TME, Supplier 2="RS Components", Supplier 3=Farnell, Supplier 4=Mouser, Supplier 5=Digi-Key, Supplier 6=LCSC, Supplier Part Number 3=3582785, Supplier Part Number 4=81-GRM155C71A105KE1D, Supplier Part Number 5=490-14457-1-ND
C209: library part C_820pF_50V_C0G_0402_5, "Capacitor", Dielectric=C0G, Manufacturer=Murata, Manufacturer Part Number=GRM1555C1H821JA01D, Tolerance (%)=5, Voltage=50V, HelpURL=https://www.murata.com/~/media/webrenewal/support/library/catalog/products/capacitor/mlcc/c02e.ashx, Part Number=C_820pF_50V_C0G_0402_5, SCH_Footprint=0402, Supplier 1=TME, Supplier 2="RS Components", Supplier 3=Farnell, Supplier 4=Mouser, Supplier 5=Digi-Key, Supplier 6=LCSC, Supplier Part Number 1=GRM1555C1H821JA01D, Supplier Part Number 2=1694052, Supplier Part Number 3=2494208, Supplier Part Number 4=81-GRM1555C1H821JA1D, Supplier Part Number 5=490-3242-1-ND
C210: library part C_47nF_25V_X7R_0402_10, "Capacitor", Dielectric=X7R, Manufacturer=Murata, Manufacturer Part Number=GRM155R71E473KA88D, Tolerance (%)=10, Voltage=25V, HelpURL=http://www.tme.eu/pl/Document/a1d29ce6b65a02ff196c94fe6adcadd2/GRM155R71E473KA88-01.pdf, Part Number=C_47nF_25V_X7R_0402_10, SCH_Footprint=0402, Supplier 1=TME, Supplier 2="RS Components", Supplier 3=Farnell, Supplier 4=Mouser, Supplier 5=Digi-Key, Supplier 6=LCSC, Supplier Part Number 1=GRM155R71E473KA88D, Supplier Part Number 2=7235256, Supplier Part Number 3=1828868, Supplier Part Number 4=81-GRM155R71E473KA88, Supplier Part Number 5=490-3254-1-ND
C214: library part C_100pF_50V_C0G_0402_5, "Capacitor", Dielectric=C0G, Manufacturer=Murata, Manufacturer Part Number=GRM1555C1H101JA01D, Tolerance (%)=5, Voltage=50V, HelpURL=http://www.tme.eu/en/Document/e3e731e59cc68b1ab6d46b158bb05733/MURATA_GRM.pdf, Part Number=C_100pF_50V_C0G_0402_5, SCH_Footprint=0402, Supplier 1=TME, Supplier 2="RS Components", Supplier 3=Farnell, Supplier 4=Mouser, Supplier 5=Digi-Key, Supplier 6=LCSC, Supplier Part Number 1=GRM1555C1H101JA01D, Supplier Part Number 2=7235363, Supplier Part Number 3=2218836, Supplier Part Number 4=81-GRM1555C1H101JA1D, Supplier Part Number 5=490-5922-1-ND
C215 C216: library part C_12pF_50V_C0G_0402_5, "Capacitor", Dielectric=C0G, Manufacturer=Murata, Manufacturer Part Number=GRM1555C1H120JA01D, Tolerance (%)=5, Voltage=50V, HelpURL=http://datasheet.octopart.com/GRM1555C1H120JA01D-Murata-datasheet-62317045.pdf, Part Number=C_12pF_50V_C0G_0402_5, SCH_Footprint=0402, Supplier 1=TME, Supplier 2="RS Components", Supplier 3=Farnell, Supplier 4=Mouser, Supplier 5=Digi-Key, Supplier 6=LCSC, Supplier Part Number 1=GRM1555C1H120JA01D, Supplier Part Number 2=7235367, Supplier Part Number 3=1828875, Supplier Part Number 4=81-GRM1555C1H120JA1D, Supplier Part Number 5=490-5924-1-ND
C217 C401 C404: library part C_10nF_16V_X7R_0402_10, "Capacitor", Dielectric=X7R, Manufacturer=Yageo, Manufacturer Part Number=CC0402KRX7R7BB103, Supplier Part Number 1=CC0402KRX7R7103, Tolerance (%)=10, Voltage=16V, HelpURL=https://datasheet.octopart.com/CC0402KRX7R7BB103-Yageo-datasheet-10883670.pdf, Part Number=C_10nF_16V_X7R_0402_10, SCH_Footprint=0402, Supplier 1=TME, Supplier 2="RS Components", Supplier 3=Farnell, Supplier 4=Mouser, Supplier 5=Digi-Key, Supplier 6=LCSC, Supplier Part Number 2=6698688, Supplier Part Number 3=3019275, Supplier Part Number 4=603-CC402KRX7R7BB103, Supplier Part Number 5=311-1042-1-ND
C301: library part C_100nF_50V_X7R_0402_10, "Capacitor", Dielectric=X7R, Manufacturer=Murata, Manufacturer Part Number=GRM155R71H104KE14D, Tolerance (%)=10, Voltage=50V, HelpURL=http://docs-europe.electrocomponents.com/webdocs/145f/0900766b8145f9d2.pdf, Part Number=C_100nF_50V_X7R_0402_10, SCH_Footprint=0402, Supplier 1=TME, Supplier 2="RS Components", Supplier 3=Farnell, Supplier 4=Mouser, Supplier 5=Digi-Key, Supplier 6=LCSC, Supplier Part Number 1=GRM155R71H104KE14D, Supplier Part Number 2=8847087, Supplier Part Number 3=2611912, Supplier Part Number 4=81-GRM155R71H104KE4D, Supplier Part Number 5=490-10700-1-ND
C302: library part C_10uF_10V_X7T_0603_20, "Capacitor", Dielectric=X7T, Manufacturer=Murata, Manufacturer Part Number=GRM188D71A106MA73D, Tolerance (%)=20, Voltage=10V, HelpURL=https://pl.mouser.com/datasheet/2/281/murata_03052018_GRM_Series_1-1310166.pdf, Part Number=C_10uF_10V_X7T_0603_20, SCH_Footprint=0603, Supplier 1=TME, Supplier 2="RS Components", Supplier 3=Farnell, Supplier 4=Mouser, Supplier 5=Digi-Key, Supplier 6=LCSC, Supplier Part Number 2=8151349, Supplier Part Number 3=2611920, Supplier Part Number 4=81-GRM188D71A106MA3D, Supplier Part Number 5=490-7200-1-ND, Supplier Part Number 6=C162270
C303 C304: library part C_1uF_25V_X7R_0603_10_2, "Capacitor", Dielectric=X7R, Manufacturer=Murata, Manufacturer Part Number=GCJ188R71E105KA01D, Tolerance (%)=10, Voltage=25V, HelpURL=https://octopart.com/datasheet/gcj188r71e105ka01d-murata-49198830, Part Number=C_1uF_25V_X7R_0603_10_2, SCH_Footprint=0603, Supplier 1=TME, Supplier 2="RS Components", Supplier 3=Farnell, Supplier 4=Mouser, Supplier 5=Digi-Key, Supplier 6=LCSC, Supplier Part Number 1=GCJ188R71E105KA01D, Supplier Part Number 2=2477733, Supplier Part Number 3=2781410, Supplier Part Number 4=81-GCJ188R71E105KA1D, Supplier Part Number 5=490-14409-1-ND
C402: library part C_10uF_16V_X5R_0603_20, "Capacitor", Dielectric=X5R, Manufacturer=Samsung, Manufacturer Part Number=CL10A106MO8NQNC, Tolerance (%)=20, Voltage=16V, HelpURL=http://www.tme.eu/pl/Document/4a42202b32dab16128fe107dd69598cc/samsung-chip-cap.pdf, Part Number=C_10uF_16V_X5R_0603_20, SCH_Footprint=0603, Supplier 1=TME, Supplier 2="RS Components", Supplier 3=Farnell, Supplier 4=Mouser, Supplier 5=Digi-Key, Supplier 6=LCSC, Supplier Part Number 1=CL10A106MO8NQNC, Supplier Part Number 4=187-CL10A106MO8NQNC, Supplier Part Number 5=1276-1870-1-ND
C403 C405: library part C_22uF_10V_X5R_0603_20, "Capacitor", Dielectric=X5R, Manufacturer=Murata, Manufacturer Part Number=GRM188R61A226ME15D, Tolerance (%)=20, Voltage=10V, HelpURL=https://www.mouser.pl/datasheet/2/281/1/GRM188R61A226ME15_02A-1985787.pdf, Part Number=C_22uF_10V_X5R_0603_20, SCH_Footprint=0603, Supplier 1=TME, Supplier 2="RS Components", Supplier 3=Farnell, Supplier 4=Mouser, Supplier 5=Digi-Key, Supplier 6=LCSC, Supplier Part Number 1=GRM188R61A226ME15D, Supplier Part Number 3=2426957, Supplier Part Number 4=81-GRM188R61A226ME5D, Supplier Part Number 5=490-10476-1-ND
C501: library part C_1uF_6.3V_X7R_0402_10, "Capacitor", Dielectric=X7R, Manufacturer=Murata, Manufacturer Part Number=GRM155R70J105KA12D, Tolerance (%)=10, Voltage=6.3V, HelpURL=https://www.mouser.com/ds/2/281/c02e-2905.pdf, Part Number=C_1uF_6.3V_X7R_0402_10, SCH_Footprint=0402, Supplier 1=TME, Supplier 2="RS Components", Supplier 3=Farnell, Supplier 4=Mouser, Supplier 5=Digi-Key, Supplier 6=LCSC, Supplier Part Number 4=81-GRM155R70J105KA2D
D401: library part OL_RGB_LTST-S310F2KT, Manufacturer=Lite-On, Manufacturer Part Number=LTST-S310F2KT, HelpURL=http://docs-europe.electrocomponents.com/webdocs/0dc0/0900766b80dc0b91.pdf, Part Number=OL_RGB_LTST-S310F2KT, SCH_Footprint=1206, Supplier 1=TME, Supplier 2="RS Components", Supplier 3=Farnell, Supplier 4=Mouser, Supplier 5=Digi-Key, Supplier 6=LCSC, Supplier Part Number 1=LTST-S310F2KT, Supplier Part Number 2=6921348P, Supplier Part Number 4=859-LTST-S310F2KT, Supplier Part Number 5=LTST-S310F2KT-ND
D402 D403: library part OL_R_APDA3020SECK/J3-PF, "LED_RED", Manufacturer=Kingbright, Manufacturer Part Number=APDA3020SECK/J3-PF, HelpURL=https://www.kingbrightusa.com/images/catalog/SPEC/APDA3020SECK-J3-PF.pdf, Part Number=OL_R_APDA3020SECK/J3-PF, SCH_Footprint=1208, Supplier 1=TME, Supplier 2="RS Components", Supplier 3=Farnell, Supplier 4=Mouser, Supplier 5=Digi-Key, Supplier 6=LCSC, Supplier Part Number 4=604-APDA3020SECKJ3PF, Supplier Part Number 5=754-1781-1-ND
F201: library part F_500mA_50V_0603, Current=500mA, Manufacturer=Bourns, Manufacturer Part Number=SF-0603F050-2, Voltage=50V, HelpURL=https://datasheet.octopart.com/SF-0603F050-2-Bourns-datasheet-16972401.pdf, Part Number=F_500mA_50V_0603, SCH_Footprint=0603, Supplier 1=TME, Supplier 2="RS Components", Supplier 3=Farnell, Supplier 4=Mouser, Supplier 5=Digi-Key, Supplier 6=LCSC, Supplier Part Number 2=6924965P, Supplier Part Number 3=1652130, Supplier Part Number 5=SF-0603F050-2CT-ND
FB501: library part FB_BLM18BB221SN1D, "Ferrite Bead", Current=200mA, Manufacturer=Murata, Manufacturer Part Number=BLM18BB221SN1D, Resistance=650mR, HelpURL=https://octopart.com/datasheet/blm18bb221sn1d-murata-118121, Part Number=FB_BLM18BB221SN1D, SCH_Footprint=0603, Supplier 1=TME, Supplier 2="RS Components", Supplier 3=Farnell, Supplier 4=Mouser, Supplier 5=Digi-Key, Supplier 6=LCSC, Supplier Part Number 1=BLM18BB221SN1D, Supplier Part Number 2=724-1302, Supplier Part Number 3=1515695, Supplier Part Number 4=81-BLM18BB221SN1D, Supplier Part Number 5=490-5210-1-ND
J601: library part J_USB_C_USB4105-GF-A, Manufacturer=GCT, Manufacturer Part Number=USB4105-GF-A, HelpURL=https://www.mouser.pl/datasheet/2/837/USB4105-2888174.pdf, Part Number=J_USB_C_USB4105-GF-A, SCH_Footprint=SMD, Supplier 1=TME, Supplier 2="RS Components", Supplier 3=Farnell, Supplier 4=Mouser, Supplier 5=Digi-Key, Supplier 6=LCSC, Supplier Part Number 3=3588205, Supplier Part Number 4=640-USB4105-GF-A, Supplier Part Number 5=2073-USB4105-GF-ACT-ND
L201: library part L_4.7nH_640mA_0402CS, "Induction", Current=640mA, Manufacturer=Coilcraft, Manufacturer Part Number=0402CS-4N7XJRW, Resistance=130mR, HelpURL=https://www.coilcraft.com/getmedia/f6cf468d-46eb-4342-9245-4b8b34f8d1bb/0402cs.pdf, Part Number=L_4.7nH_640mA_0402CS, SCH_Footprint=0402CS, Supplier 1=TME, Supplier 2="RS Components", Supplier 3=Farnell, Supplier 4=Mouser, Supplier 5=Digi-Key, Supplier 6=LCSC, Supplier 7=Coilcraft, Supplier Part Number 3=2285711, Supplier Part Number 4=994-0402CS-4N7XJRW, Supplier Part Number 5=2457-0402CS-4N7XJRW, Supplier Part Number 7=0402CS-4N7XJRW
L203: library part L_10uH_300mA_LQM18DZ100M70L, "Induction", Current=300mA, Manufacturer=Murata, Manufacturer Part Number=LQM18DZ100M70L, Resistance=1R05, HelpURL=https://search.murata.co.jp/Ceramy/image/img/P02/JELF243B-9128.pdf, Part Number=L_10uH_300mA_LQM18DZ100M70L, SCH_Footprint=0603, Supplier 1=TME, Supplier 2="RS Components", Supplier 3=Farnell, Supplier 4=Mouser, Supplier 5=Digi-Key, Supplier 6=LCSC, Supplier Part Number 1=LQM18DZ100M70L, Supplier Part Number 4=81-LQM18DZ100M70L, Supplier Part Number 5=490-LQM18DZ100M70LCT-ND
L204: library part L_15nH_460mA_0402, "Induction", Current=460mA, Manufacturer=Murata, Manufacturer Part Number=LQW15AN15NJ00D, Resistance=160mR, HelpURL=http://datasheet.octopart.com/LQW15AN15NJ00D-Murata-datasheet-12510052.pdf, Part Number=L_15nH_460mA_0402, SCH_Footprint=0402, Supplier 1=TME, Supplier 2="RS Components", Supplier 3=Farnell, Supplier 4=Mouser, Supplier 5=Digi-Key, Supplier 6=LCSC, Supplier Part Number 1=LQW15AN15NJ00D, Supplier Part Number 2=107766, Supplier Part Number 3=2672844, Supplier Part Number 4=81-LQW15AN15NJ00D, Supplier Part Number 5=490-1148-1-ND
L401: library part L_4.7uH_1A_WE-TPC, "Induction", Current=1A, Manufacturer="Wurth Elektronik", Manufacturer Part Number=744029004, Resistance=200mR, HelpURL=https://www.we-online.com/components/products/datasheet/744029004.pdf, Part Number=L_4.7uH_1A_WE-TPC, SCH_Footprint=WE-TPC, Supplier 1=TME, Supplier 2="RS Components", Supplier 3=Farnell, Supplier 4=Mouser, Supplier 5=Digi-Key, Supplier 6=LCSC, Supplier 7=WinSource, Supplier Part Number 2=6690176P, Supplier Part Number 3=1635826, Supplier Part Number 4=710-744029004, Supplier Part Number 5=732-1089-1-ND, Supplier Part Number 7=857207-744029004
P201: library part P_HEADER_2x5_1.27, "Pin Header", Manufacturer=FCI, Manufacturer Part Number=20021121-00010C4LF, HelpURL=http://www.mouser.com/catalog/645/usd/1591.pdf, Part Number=P_HEADER_2x5_1.27, SCH_Footprint="2x5 1.27mm", Supplier 1=TME, Supplier 2="RS Components", Supplier 3=Farnell, Supplier 4=Mouser, Supplier 5=Digi-Key, Supplier 6=LCSC, Supplier Part Number 1=20021121-00010C4LF, Supplier Part Number 2=794-4584, Supplier Part Number 3=1865279, Supplier Part Number 4=649-202112100010C4LF, Supplier Part Number 5=609-3695-1-ND
Q401: library part QN_2N7002K-7, Current=0A8, Manufacturer="Diodes Inc", Voltage=60V, HelpURL=http://datasheet.octopart.com/2N7002K-7-Diodes-Inc.-datasheet-12515815.pdf, Manufacturer Part Number=2N7002K-7, Part Number=QN_2N7002K-7, SCH_Footprint=SOT23, Supplier 1=TME, Supplier 2="RS Components", Supplier 3=Farnell, Supplier 4=Mouser, Supplier 5=Digi-Key, Supplier 6=LCSC, Supplier Part Number 2=7703383, Supplier Part Number 3=1713825, Supplier Part Number 4=621-2N7002K-7, Supplier Part Number 5=2N7002K-7DICT-ND, Type=N-MOS
R201 R301 R302 R401 R411: library part R_47k_0402_1, Manufacturer=Yageo, Manufacturer Part Number=RC0402FR-0747KL, Power=63mW, Tolerance=1%, Voltage=50V, HelpURL=https://datasheet.octopart.com/RC0402FR-0747KL-Yageo-datasheet-10408619.pdf, Part Number=R_47k_0402_1, SCH_Footprint=0402, Supplier 1=TME, Supplier 2="RS Components", Supplier 3=Farnell, Supplier 4=Mouser, Supplier 5=Digi-Key, Supplier 6=LCSC, Supplier Part Number 1=RC0402FR-0747KL, Supplier Part Number 3=2421898, Supplier Part Number 4=603-RC0402FR-0747KL, Supplier Part Number 5=311-47.0KLRCT-ND
R202 R407: library part R_1k_0402_1, Manufacturer=Yageo, Manufacturer Part Number=RC0402FR-071K, Power=63mW, Tolerance=1%, Voltage=50V, HelpURL=http://www.tme.eu/pl/Document/1a2bc76e2be68b3b1670068306778ce6/rc0402yageo.pdf, Part Number=R_1k_0402_1, SCH_Footprint=0402, Supplier 1=TME, Supplier 2="RS Components", Supplier 3=Farnell, Supplier 4=Mouser, Supplier 5=Digi-Key, Supplier 6=LCSC, Supplier Part Number 1=RC0402FR-071K, Supplier Part Number 3=9239235, Supplier Part Number 4=603-RC0402FR-071KP, Supplier Part Number 5=311-1.00KLRCT-ND
R305: library part R_18k_0402_1, Manufacturer="TE Connectivity", Manufacturer Part Number=CRG0402F18K, Power=63mW, Tolerance=1%, Voltage=50V, HelpURL=http://www.mouser.com/ds/2/418/NG_CD_1676480_BA-657809.pdf, Part Number=R_18k_0402_1, SCH_Footprint=0402, Supplier 1=TME, Supplier 2="RS Components", Supplier 3=Farnell, Supplier 4=Mouser, Supplier 5=Digi-Key, Supplier 6=LCSC, Supplier Part Number 3=2331472RL, Supplier Part Number 4=279-CRG0402F18K, Supplier Part Number 5=CRG0402F18K-ND
R306: library part R_620R_0402_1, Manufacturer=Panasonic, Manufacturer Part Number=ERJ-S02F6200X, Power=100mW, Tolerance=1%, Voltage=50V, HelpURL=https://industrial.panasonic.com/cdbs/www-data/pdf/RDP0000/AOA0000C334.pdf, Part Number=R_620R_0402_1, SCH_Footprint=0402, Supplier 1=TME, Supplier 2="RS Components", Supplier 3=Farnell, Supplier 4=Mouser, Supplier 5=Digi-Key, Supplier 6=LCSC, Supplier Part Number 3=3310109, Supplier Part Number 4=667-ERJ-S02F6200X, Supplier Part Number 5=ERJ-S02F6200X-ND, Supplier Part Number 6=C2127168
R402 R405: library part R_510R_0402_1_AECQ0, Manufacturer=Panasonic, Manufacturer Part Number=ERJ-2RKF5100X, Power=100mW, Supplier Part Number 1=ERJ2RKF5100X, Tolerance=1%, Voltage=50V, AEC-Q=0, HelpURL=https://datasheet.octopart.com/Precision-Thick-Film-Chip-Resistors-Panasonic-datasheet-family-106.pdf, Part Number=R_510R_0402_1_AECQ0, SCH_Footprint=0402, Supplier 1=TME, Supplier 2="RS Components", Supplier 3=Farnell, Supplier 4=Mouser, Supplier 5=Digi-Key, Supplier 6=LCSC, Supplier Part Number 2=176-3562, Supplier Part Number 3=2302602, Supplier Part Number 4=667-ERJ-2RKF5100X, Supplier Part Number 5=P510LCT-ND
R403: library part R_680m_0603_1, Manufacturer="TE Connectivity", Manufacturer Part Number=RLP73K1JR68FTDF, Power=125mW, Tolerance=1%, Voltage=290mV, HelpURL=https://www.te.com/commerce/DocumentDelivery/DDEController?Action=showdoc&DocId=Data+Sheet%7F1773269%7FL%7Fpdf%7FEnglish%7FENG_DS_1773269_L.pdf%7F2-2176051-8, Part Number=R_680m_0603_1, SCH_Footprint=0603, Supplier 1=TME, Supplier 2="RS Components", Supplier 3=Farnell, Supplier 4=Mouser, Supplier 5=Digi-Key, Supplier 6=LCSC, Supplier Part Number 4=279-RLP73K1JR68FTDF, Supplier Part Number 5=A109584CT-ND
R404 R406: library part R_68R_0603_1, Manufacturer=Vishay, Manufacturer Part Number=CRCW060368R0FKEAHP, Power=330mW, Tolerance=1%, Voltage=75V, HelpURL=https://www.vishay.com/docs/20043/crcwhpe3.pdf, Part Number=R_68R_0603_1, SCH_Footprint=0603, Supplier 1=TME, Supplier 2="RS Components", Supplier 3=Farnell, Supplier 4=Mouser, Supplier 5=Digi-Key, Supplier 6=LCSC, Supplier Part Number 3=1738889, Supplier Part Number 4=71-CRCW060368R0FKEAH, Supplier Part Number 5=541-68.0SCT-ND, Supplier Part Number 6=C242566
R408: library part R_680R_0402_1, Manufacturer=Vishay, Manufacturer Part Number=CRCW0402680RFKED, Power=63mW, Tolerance=1%, Voltage=50V, HelpURL=https://pl.mouser.com/datasheet/2/427/dcrcwe3-1762152.pdf, Part Number=R_680R_0402_1, SCH_Footprint=0402, Supplier 1=TME, Supplier 2="RS Components", Supplier 3=Farnell, Supplier 4=Mouser, Supplier 5=Digi-Key, Supplier 6=LCSC, Supplier Part Number 2=678-9510, Supplier Part Number 3=2140759, Supplier Part Number 4=71-CRCW0402-680-E3, Supplier Part Number 5=541-680LCT-ND
R409 R410: library part R_330R_0402_1_AECQ0, Manufacturer=Panasonic, Manufacturer Part Number=ERJ-2RKF3300X, Power=100mW, Tolerance=1%, Voltage=50V, AEC-Q=0, HelpURL=http://datasheet.octopart.com/ERJ2RKF3300X-Panasonic-datasheet-13266541.pdf, Part Number=R_330R_0402_1_AECQ0, SCH_Footprint=0402, Supplier 1=TME, Supplier 2="RS Components", Supplier 3=Farnell, Supplier 4=Mouser, Supplier 5=Digi-Key, Supplier 6=LCSC, Supplier Part Number 2=7325444, Supplier Part Number 3=2302581, Supplier Part Number 4=667-ERJ-2RKF3300X, Supplier Part Number 5=P330LCT-ND
R601 R602: library part R_27R_0402_1, Manufacturer=Vishay, Manufacturer Part Number=CRCW040227R0FKED, Power=63mW, Tolerance=1%, Voltage=50V, HelpURL=http://datasheet.octopart.com/CRCW040227R0FKED-Vishay-datasheet-66077789.pdf, Part Number=R_27R_0402_1, SCH_Footprint=0402, Supplier 1=TME, Supplier 2="RS Components", Supplier 3=Farnell, Supplier 4=Mouser, Supplier 5=Digi-Key, Supplier 6=LCSC, Supplier Part Number 2=6789052, Supplier Part Number 3=2140614, Supplier Part Number 4=71-CRCW040227R0FKED, Supplier Part Number 5=541-27.0LCT-ND
R603: library part R_10k_0402_1, Manufacturer=Yageo, Manufacturer Part Number=RC0402FR-0710KL, Power=63mW, Supplier Part Number 1=RC0402FR-0710K, Tolerance=1%, Voltage=50V, HelpURL=http://www.tme.eu/pl/Document/1a2bc76e2be68b3b1670068306778ce6/rc0402yageo.pdf, Part Number=R_10k_0402_1, SCH_Footprint=0402, Supplier 1=TME, Supplier 2="RS Components", Supplier 3=Farnell, Supplier 4=Mouser, Supplier 5=Digi-Key, Supplier 6=LCSC
R604 R605: library part R_5.1k_0402_1, Manufacturer=Yageo, Manufacturer Part Number=RC0402FR-075K1L, Power=63mW, Tolerance=1%, Voltage=50V, HelpURL=https://www.tme.eu/Document/92d375a0b5e7ae71098c0026a66a663c/RC0201FR-07100KL.PDF, Part Number=R_5.1k_0402_1, SCH_Footprint=0402, Supplier 1=TME, Supplier 2="RS Components", Supplier 3=Farnell, Supplier 4=Mouser, Supplier 5=Digi-Key, Supplier 6=LCSC, Supplier Part Number 1=RC0402FR-075K1L, Supplier Part Number 2=1987836, Supplier Part Number 3=1458805, Supplier Part Number 4=603-RC0402FR-075K1L, Supplier Part Number 5=311-5.10KLRCT-ND
S201: library part S_B3U-1000PM, "Tact Switch", Manufacturer=OMRON, Manufacturer Part Number=B3U-1000PM, HelpURL=https://www.tme.eu/Document/abdade7e1ca56d20235b5c747d7227eb/B3U.PDF, Part Number=S_B3U-1000PM, SCH_Footprint=B3U-1000P(M), Supplier 1=TME, Supplier 2="RS Components", Supplier 3=Farnell, Supplier 4=Mouser, Supplier 5=Digi-Key, Supplier 6=LCSC, Supplier Part Number 1=B3U-1000PM, Supplier Part Number 4=653-B3U-1000PM
S401 S402: library part S_EVQ-9P701P, "Tact Switch", Manufacturer=Panasonic, Manufacturer Part Number=EVQ-9P701P, HelpURL=https://www.mouser.pl/datasheet/2/315/PANAS45028_1-2560407.pdf, Part Number=S_EVQ-9P701P, Supplier 1=TME, Supplier 2="RS Components", Supplier 3=Farnell, Supplier 4=Mouser, Supplier 5=Digi-Key, Supplier 6=LCSC, Supplier Part Number 4=667-EVQ-9P701P, Supplier Part Number 5=P19095CT-ND
TVS601: library part TVS_PESD2USB5UX-TR, Current=8A, Manufacturer=Nexperia, Manufacturer Part Number=PESD2USB5UX-TR, Voltage=5.0V, HelpURL=https://assets.nexperia.com/documents/data-sheet/PESD2USB5UX-T.pdf, Part Number=TVS_PESD2USB5UX-TR, SCH_Footprint=SOT23, Supplier 1=TME, Supplier 2="RS Components", Supplier 3=Farnell, Supplier 4=Mouser, Supplier 5=Digi-Key, Supplier 6=LCSC, Supplier Part Number 4=771-PESD2USB5UX-TR, Supplier Part Number 5=1727-PESD2USB5UX-CT-ND
U201: library part UP_NRF52833-QDAA, Manufacturer="Nordic Semiconductor", Manufacturer Part Number=NRF52833-QDAA_R7, HelpURL=https://docs-be.nordicsemi.com/bundle/ps_nrf52833/attach/nRF52833_PS_v1.7.pdf?_LANG=enus, Part Number=UP_NRF52833-QDAA, SCH_Footprint=QFN40_5x5, Supplier 1=TME, Supplier 2="RS Components", Supplier 3=Farnell, Supplier 4=Mouser, Supplier 5=Digi-Key, Supplier 6=LCSC, Supplier Part Number 4=949-NRF52833-QDAA-R7, Supplier Part Number 5=4823-NRF52833-QDAA-R7CT-ND
U301: library part U_BQ25185DLHR, Manufacturer="Texas Instruments", Manufacturer Part Number=BQ25185DLHR, HelpURL=https://www.ti.com/lit/ds/symlink/bq25185.pdf?ts=1724998842149&ref_url=https%253A%252F%252Fwww.ti.com%252Fproduct%252FBQ25185, Part Number=U_BQ25185DLHR, SCH_Footprint=WSON10, Supplier 1=TME, Supplier 2="RS Components", Supplier 3=Farnell, Supplier 4=Mouser, Supplier 5=Digi-Key, Supplier 6=LCSC, Supplier 7="Texas Instruments", Supplier Part Number 4=595-BQ25185DLHR, Supplier Part Number 5=296-BQ25185DLHRCT-ND, Supplier Part Number 7=BQ25185DLHR
U401: library part VS_MCP1643/MS, Frequency (kHz)=1000, Manufacturer=Microchip, Manufacturer Part Number=MCP1643T-I/MS, Supplier Part Number 1=MCP1643-I/MS, HelpURL=https://ww1.microchip.com/downloads/aemDocuments/documents/APID/ProductDocuments/DataSheets/MCP1643-Data-Sheet-DS20005208.pdf, Imax (A)=0,55, Iswitch (A)=0, Part Number=VS_MCP1643/MS, SCH_Footprint=MSOP8_3x3, Supplier 1=TME, Supplier 2="RS Components", Supplier 3=Farnell, Supplier 4=Mouser, Supplier 5=Digi-Key, Supplier 6=LCSC, Supplier Part Number 4=579-MCP1643T-I/MS, Supplier Part Number 5=MCP1643T-I/MSCT-ND, Topology=Boost, Vin max (V)=5, Vin min (V)=0,65, Vout max (V)=5, Vout min (V)=0,6
U501: library part U_ADXL345BCCZ-RL7, Manufacturer="Analog Devices", Manufacturer Part Number=ADXL345BCCZ-RL7, HelpURL=https://www.analog.com/media/en/technical-documentation/data-sheets/adxl345.pdf, Part Number=U_ADXL345BCCZ-RL7, SCH_Footprint=14LGA, Supplier 1=TME, Supplier 2="RS Components", Supplier 3=Farnell, Supplier 4=Mouser, Supplier 5=Digi-Key, Supplier 6=LCSC, Supplier Part Number 4=584-ADXL345BCCZ-R7, Supplier Part Number 5=505-ADXL345BCCZ-RL7CT-ND
X201: library part X_NX2016SA-32M-EXS00A-CS06465, Manufacturer=NDK, HelpURL=https://pl.mouser.com/datasheet/2/905/ndk_08142018_NX2016SA-32M-EXS00A-CS06465_SS-1389053.pdf, Part Number=X_NX2016SA-32M-EXS00A-CS06465, SCH_Footprint=2x1.6, Supplier 1=TME, Supplier 2="RS Components", Supplier 3=Farnell, Supplier 4=Mouser, Supplier 5=Digi-Key, Supplier 6=LCSC, Supplier Part Number 4=344-NX2016SA32S06465, Supplier Part Number 5=644-1300-1-ND

## Via types
v1: diameter 0.45, hole 0.3, Top Layer to Bottom Layer, tented both sides, 133 vias
v2: diameter 0.45, hole 0.3, Top Layer to Bottom Layer, 120 vias
v3: diameter 0.7, hole 0.4, Top Layer to Bottom Layer, tented both sides, 18 vias
v4: diameter 0.45, hole 0.2, Top Layer to Bottom Layer, tented both sides, 9 vias
v5: diameter 0.635, hole 0.3, Top Layer to Bottom Layer, 9 vias

## Nets (pads, with @x,y where several pads share a name; then routed paths per layer and width w, separated by ;. In a path a pad name is that pad's centre, name@x,y a point inside that pad or via, vN(x,y) a via of type N, cw(c..) or ccw(c..) an arc to the next point about the centre after c; other vN are vias at no path point)
5V_USB: C208.1 C303.1 J601.AB49 J601.BA49 U201.10 U301.10 | length 13.8
  Top Layer w0.2: U301.10 10.925,10.3 11.354,10.729 C303.1 C303.1@11.36,11.484 ; C208.1 17.2,18.838 17.962,19.6 U201.10
  Top Layer w0.4: C303.1@11.36,11.484 11.478,11.601 11.478,13.278 16.425,18.225 C208.1
GND: BAT301.2 BAT302.2 C202.2 C203.2 C204.2 C205.2 C206.2 C207.2 C208.2 C209.2 C210.2 C211.2 C212.2 C213.2 C214.2 C215.2 C216.2 C217.2 C218.2 C301.2 C302.2 C303.2 C304.2 C401.2 C402.2 C403.2 C404.2 C405.2 C501.2 C502.2 J601.AB112 J601.BA112 P201.3 P201.5 Q401.2 R302.1 R305.1 R306.1 R401.2 R403.1 R411.1 R603.1 R604.1 R605.1 S201.2 S401.2 S402.2 TVS601.3 U201.37 U201.EP1 U301.4 U301.5 U301.EP1 U401.6 U401.7 U501.2 U501.4 U501.5 U501.11 U501.12 X201.2 X201.4 | length 29.2
  Top Layer w0.2: C405.2 C302.2 C303.2 ; C501.2 10.417,34.073 10.417,32.698 U501.5 ; U501.4 11.243,31.658 v1@11.588,31.314 ; C401.2 12.103,3.898 12.275,3.725 12.275,3.025 v1(12.3,3) ; v1(11.574,31.3) 11.995,30.879 11.995,30.069 U501.11 ; U501.12 v1(12.843,31.3) U501.2 12.877,32.704 12.877,33.967 C502.2 ; R305.1 R306.1 ; R605.1 16.45,8.21 16.458,8.202 16.458,7.742 16.687,7.513 16.687,6.868 J601.AB112 ; C213.2 C210.2 20.99,25.877 20.704,25.591 20.704,24.691 20.6,24.587 20.6,23.05 20.95,22.7 v5(21.2,22.7) ; C206.2 22.905,16.505 23.595,16.505 v1(23.6,16.5) ; J601.BA112 23.2,7.4 23.35,7.55 R604.1 ; C217.2 27.41,7.61 27.6,7.8 S201.2
  Top Layer w0.254: C501.2@10.382,34.267 C501.2@10.413,34.236
  Top Layer w0.3: U401.6 U401.7
  Bottom Layer w0.3: v1(29.1,5.5) P201.5 P201.3
  other v1: 34.2,3.9 37,5.6 37.5,5.6 38,5.6 38.5,5.588 39,5.6 4.5,6.7 5,6.7 5.5,6.7 6,6.7 4.5,7.2 5,7.2 5.5,7.2 6,7.2 9.4,8.1 38.5,8.388 37,8.4 37.5,8.4 38,8.4 39,8.4 4.7,8.6 9.9,12.3 9.9,12.8 30,14.7 18.3,15.3 30,15.6 17.2,15.9 34.544,16.256 35.306,16.256 36.068,16.256 36.83,16.256 37.592,16.256 38.354,16.256 39.116,16.256 16.3,16.8 34.544,17.018 34.544,17.78 25.8,18.4 14.5,18.5 34.544,18.542 34.544,19.304 13.7,19.4 13.7,20.6 2.2,20.8 2.9,20.8 6.1,21.3 14.5,21.5 6.1,22.1 34.544,22.098 27,22.5 4.1,22.6 34.544,22.86 27,23.1 34.544,23.622 25.3,23.7 34.544,24.384 16.5,25 34.544,25.146 16.8,25.5 28.5,25.6 34.544,25.908 27.7,26.3 34.544,26.67 35.306,26.67 36.068,26.67 36.83,26.67 37.592,26.67 38.354,26.67 39.116,26.67 27.1,27.1 17.9,27.3 26.3,27.9 3.6,28.3 4.3,28.3 12,28.9 12.8,28.9 4.3,29.2 3.6,30.1 4.3,30.1 11.3,33.8 11.3,34.5 12.9,34.8
  other v2: 12.7,2.54 25.4,2.54 3.81,5.08 6.35,5.08 34.29,5.08 10.16,7.62 21.7,8.8 18.4,8.9 9.4,9 18.4,9.6 21.7,9.6 9.4,10 20.404,10.165 24.13,10.16 19.7,10.2 18.504,10.382 21.596,10.51 18.504,11.086 21.596,11.214 18.504,11.79 21.596,11.918 19.8,12.2 20.3,12.2 18.4,12.5 21.7,12.6 17.78,12.7 22.86,12.7 25.4,12.7 33.02,12.7 20,12.8 18.4,13.2 21.7,13.4 19.234,14.35 20.866,14.53 19.234,15.054 8.89,15.24 11.43,15.24 16.51,15.24 20.866,15.234 29.21,15.24 34.29,15.24 36.83,15.24 19.234,15.758 20.842,15.923 19.234,16.462 20.845,16.492 19.2,17.1 2.54,17.78 33.02,17.78 19.234,17.87 25,19.9 25.6,19.9 26.8,19.9 27.4,19.9 29.979,20.06 30.683,20.06 31.387,20.06 32.879,20.062 32.2,20.1 27.946,20.15 28.65,20.15 29.354,20.15 33.576,20.145 34.28,20.15 8.89,20.32 11.43,20.32 27.3,21.4 34.397,21.47 28,21.5 28.7,21.5 29.3,21.5 29.9,21.5 30.5,21.5 31.8,21.5 32.4,21.5 33,21.5 33.7,22.3 2.54,22.86 10.16,22.86 12.7,22.86 27.94,22.86 30.48,22.86 33.02,22.86 6.35,25.4 8.89,25.4 29.21,25.4 31.75,25.4 12.7,27.94 17.78,27.94 25.4,27.94 27.94,27.94 30.48,27.94 33.02,27.94 35.56,27.94 38.1,27.94 6.35,30.48 16.51,30.48 19.05,30.48 24.13,30.48 26.67,30.48 29.21,30.48 31.75,30.48 34.29,30.48 36.83,30.48 5.08,33.02 15.24,33.02 22.86,33.02 30.48,33.02 33.02,33.02 35.56,33.02 38.1,33.02 3.81,35.56 6.35,35.56 8.89,35.56 11.43,35.56 13.97,35.56 16.51,35.56 31.75,35.56 34.29,35.56 5.08,38.1
  other v3: 1,7 2,7 3,7 37,7 38,7 39,7
  other v5: 19.9,20.1 21.2,20.1 22.5,20.1 19.9,21.4 21.2,21.4 22.5,21.4 19.9,22.7 22.5,22.7
I2C.SCL: U201.2 U501.14 | length 11.6
  Top Layer w0.2: U501.14 13.976,31.354 15.046,31.354 15.5,30.9 15.5,25.046 17.746,22.8 U201.2
I2C.SDA: U201.3 U501.13 | length 10.3
  Top Layer w0.2: U501.13 13.643,26.357 17.6,22.4 U201.3
LED_RGB.B: R410.1 U201.34 | length 12.7
  Top Layer w0.2: U201.34 21.8,25.075 22.4,25.675 22.4,30.4 21.8,31 R410.1
LED_RGB.G: R409.1 U201.35 | length 13
  Top Layer w0.2: R409.1 20.6,34.1 21.473,33.227 21.473,30.827 22,30.3 22,25.738 21.4,25.138 U201.35
LED_RGB.R: R408.1 U201.36 | length 13.3
  Top Layer w0.2: R408.1 19.4,34.4 21.05,32.75 21.05,30.75 21.6,30.2 21.6,25.8 21.031,25.231 21.031,24.556 21,24.525 U201.36
NetANT201_1: ANT201.1 ANT201.2 C202.1 L201.2 | length 5.4
  Top Layer w0.263: C202.1@33.695,20.805 C202.1
  Top Layer w0.59: L201.2 32.815,20.805 C202.1@33.695,20.805 ; C202.1 36.59,20.81 ANT201.2 ANT201.1
NetBAT301_1: BAT301.1 C304.1 F201.1 U301.2 | length 45.2
  Top Layer w0.152: C304.1 5.725,9.9 U301.2
  Bottom Layer w1: v3(1,13) v3(2,13) v3(3,13) 5.323,13 v1(5.553,12.769) 5.553,9.447 10.8,4.2 31.5,4.2 35.3,8 35.3,8.9
  other v1: 35,9.7 35.5,9.7 35,10.2 35.5,10.2 35,10.7 35.5,10.7 4.553,12.769 5.053,12.769 4.553,13.269 5.053,13.269 5.553,13.269
NetC201_1: C201.1 C218.1 L201.1 U201.24 | length 8.4
  Top Layer w0.2: U201.24 24.3,20.8 24.526,20.574 24.8,20.574
  Top Layer w0.59: 24.8,20.574 27.382,20.574 27.618,20.81 C218.1 31.98,20.81 L201.1
NetC201_2: C201.2 U201.25 | length 2.3
  Top Layer w0.2: U201.25 24.687,21.2 24.791,21.096 25.228,21.096 25.493,21.361 25.871,21.361 C201.2